# Altium PCB Top_old.PcbDoc (part 1 of 3)
Units mm, origin at the board's own origin, x right, y up, seen from the top; angles counter-clockwise.
Board outline 65.25 x 71.45 mm, 4 copper layers (Top Layer, GND, PWR_3V3, Bottom Layer), stack 0.603 mm thick; 141 components, 87 nets, 448 pads, 153 vias.
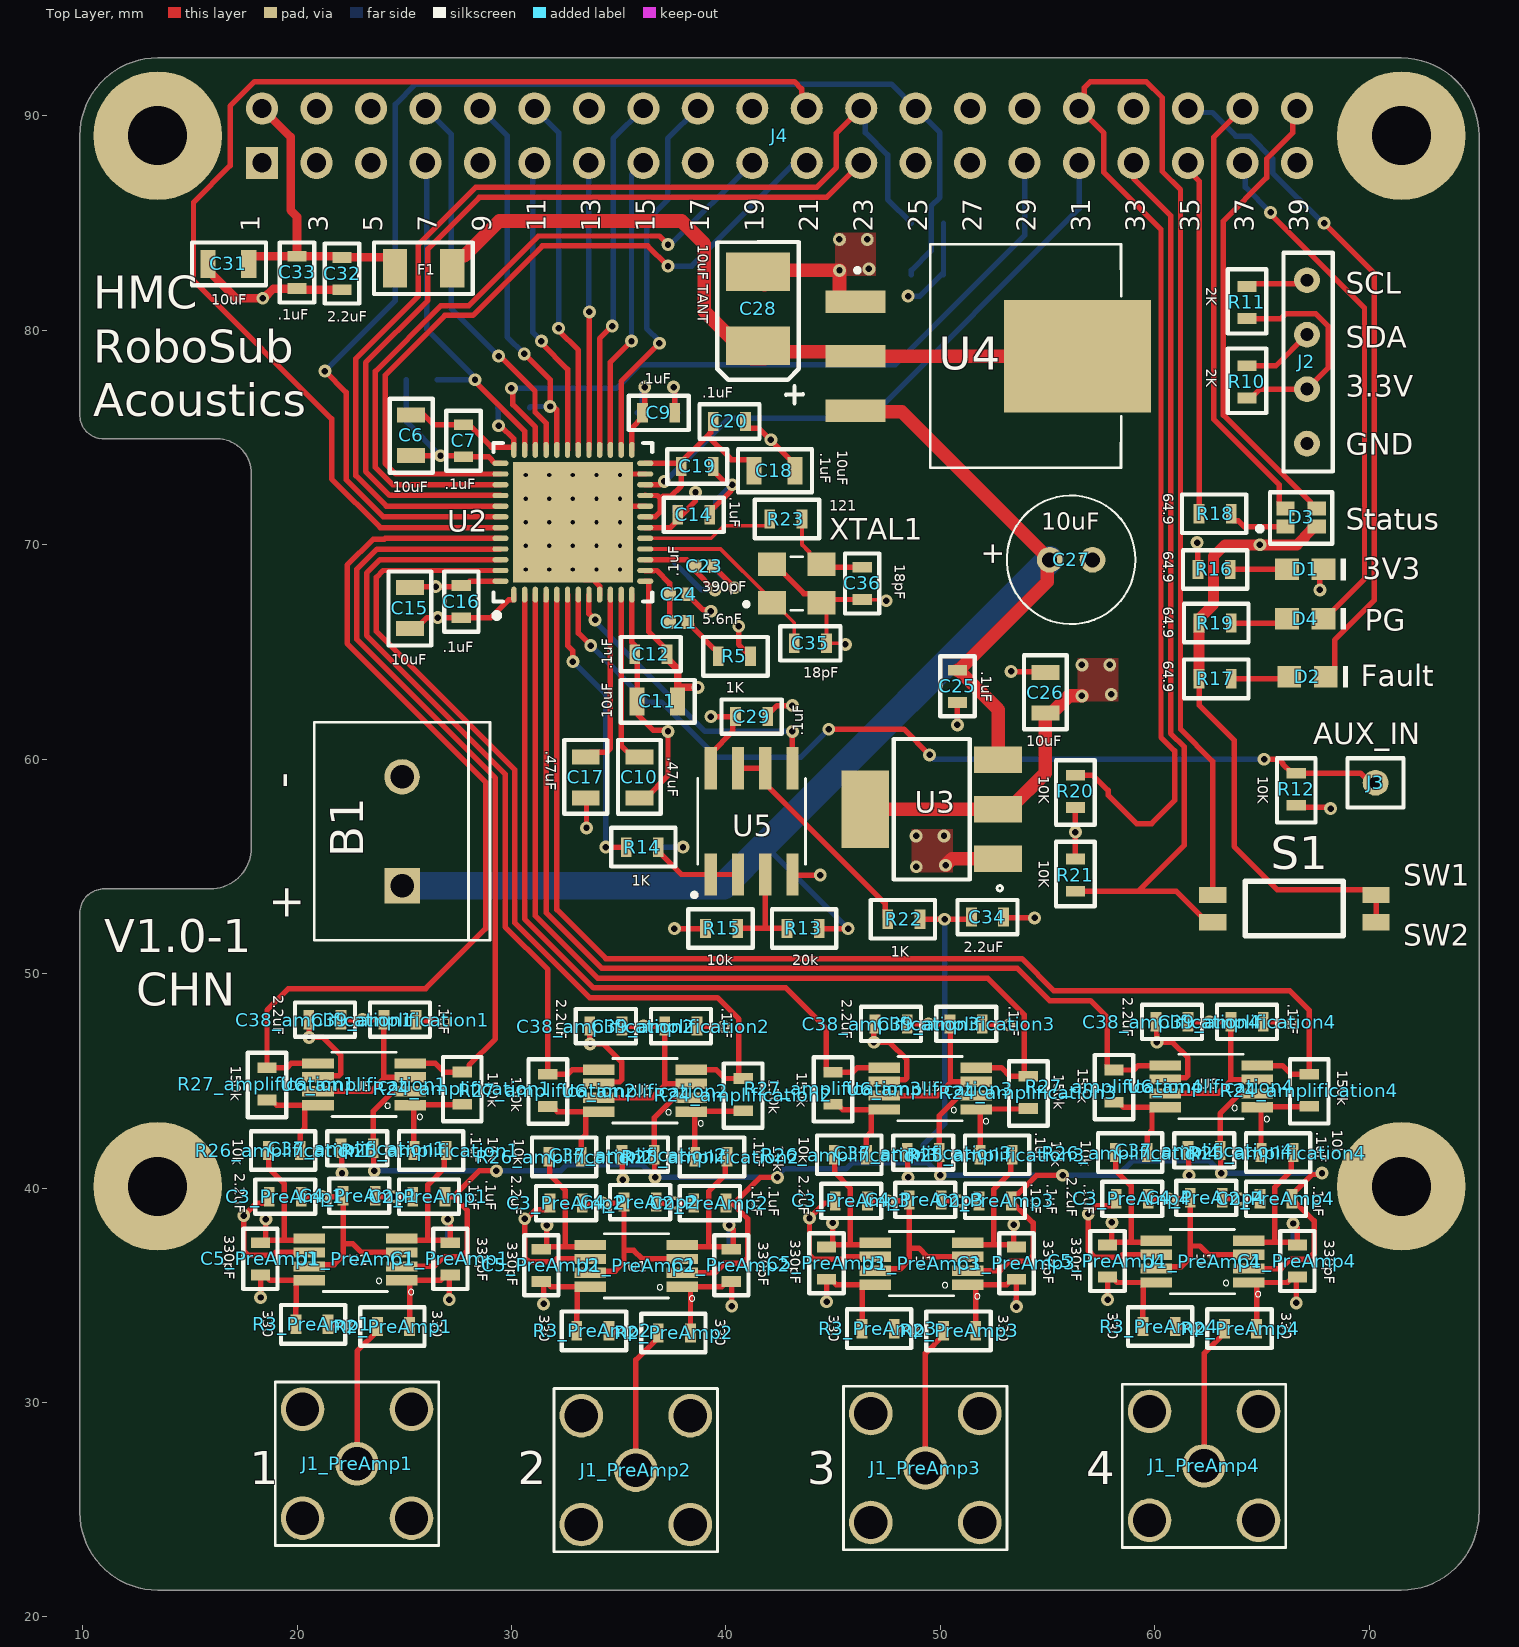
[diagram p0: Top Layer view]
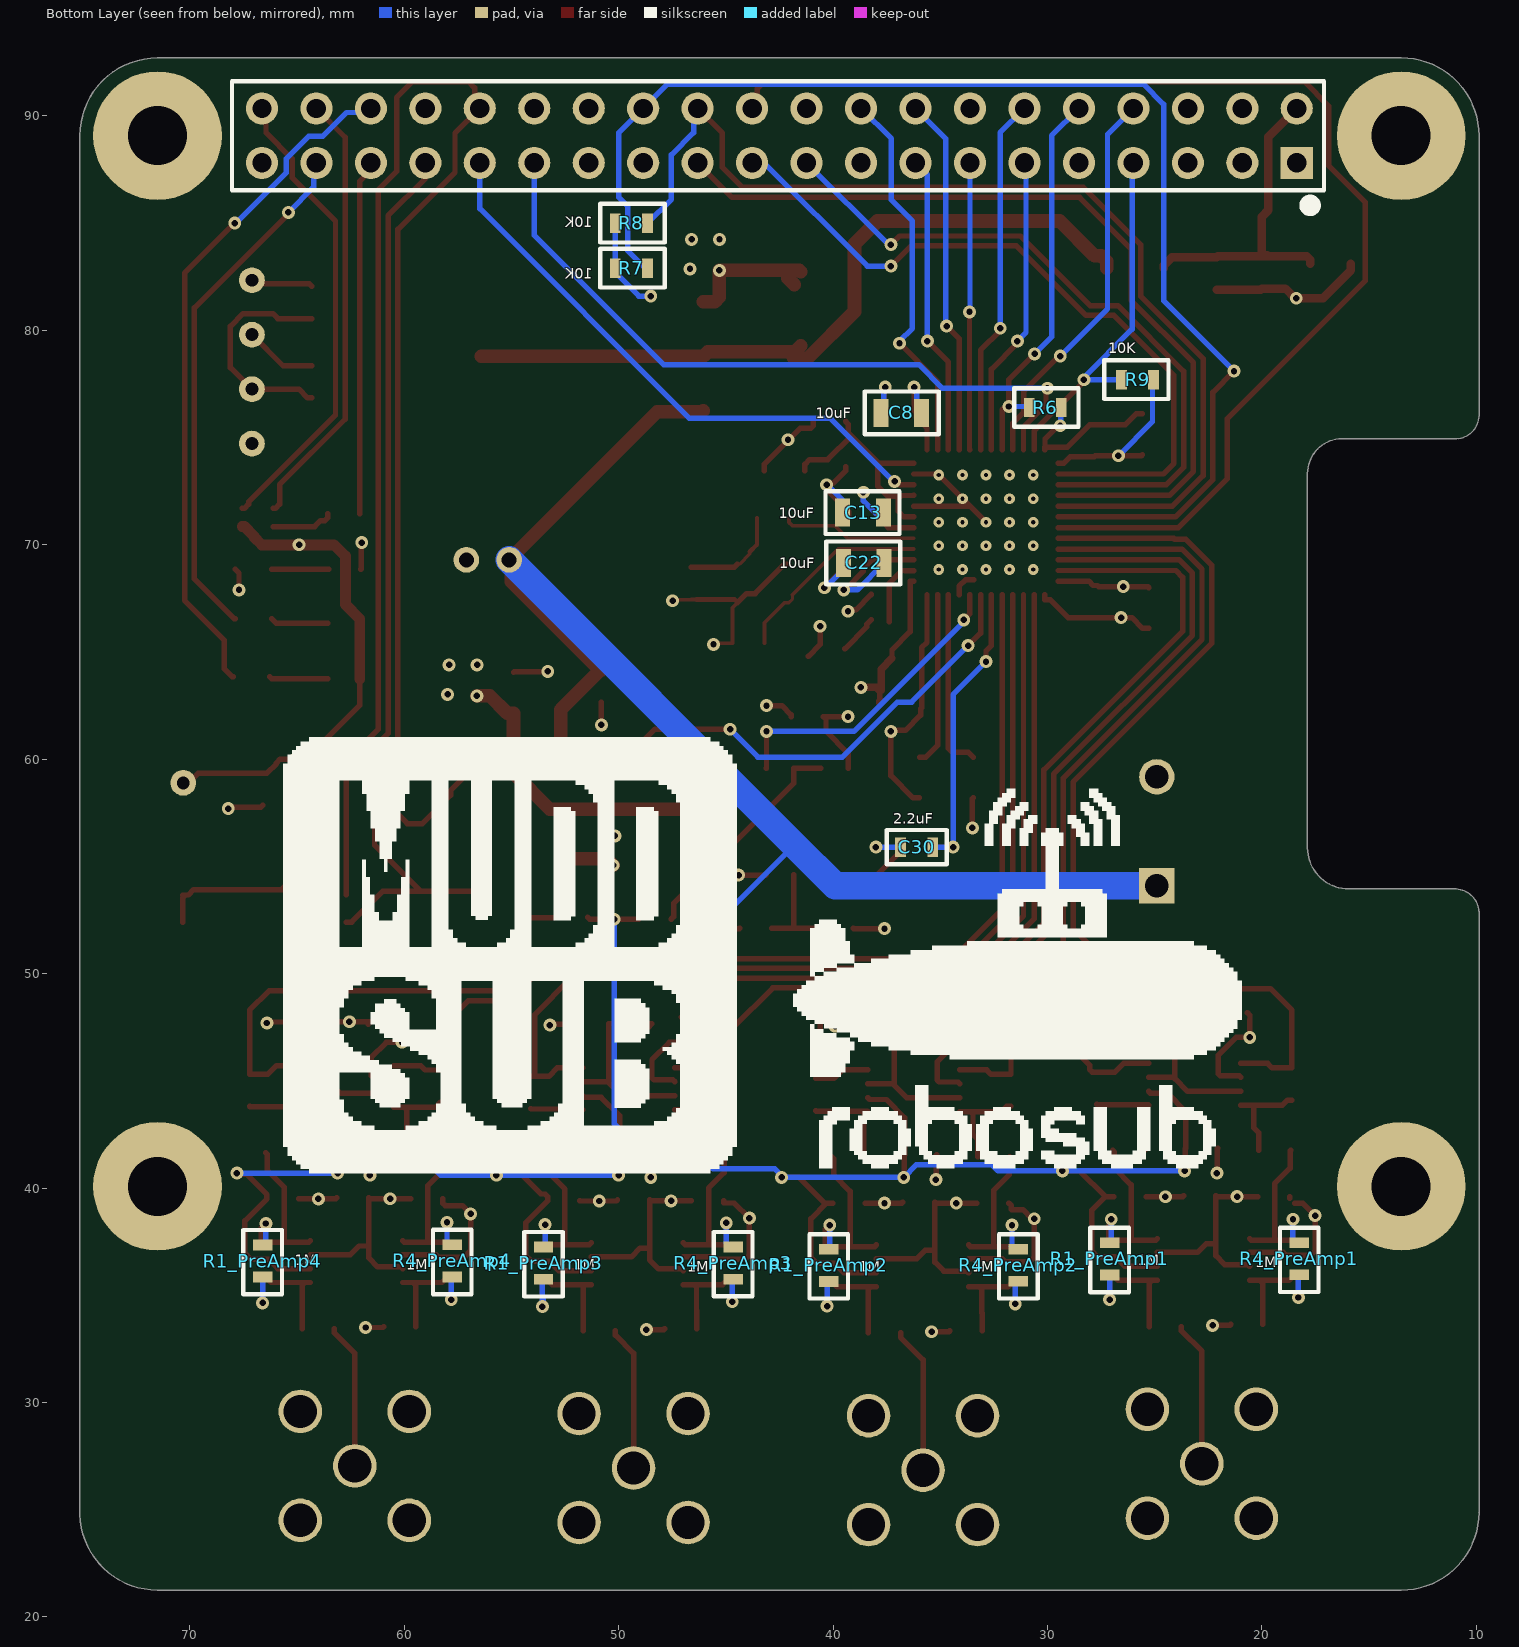
[diagram p1: Bottom Layer view, seen from below]
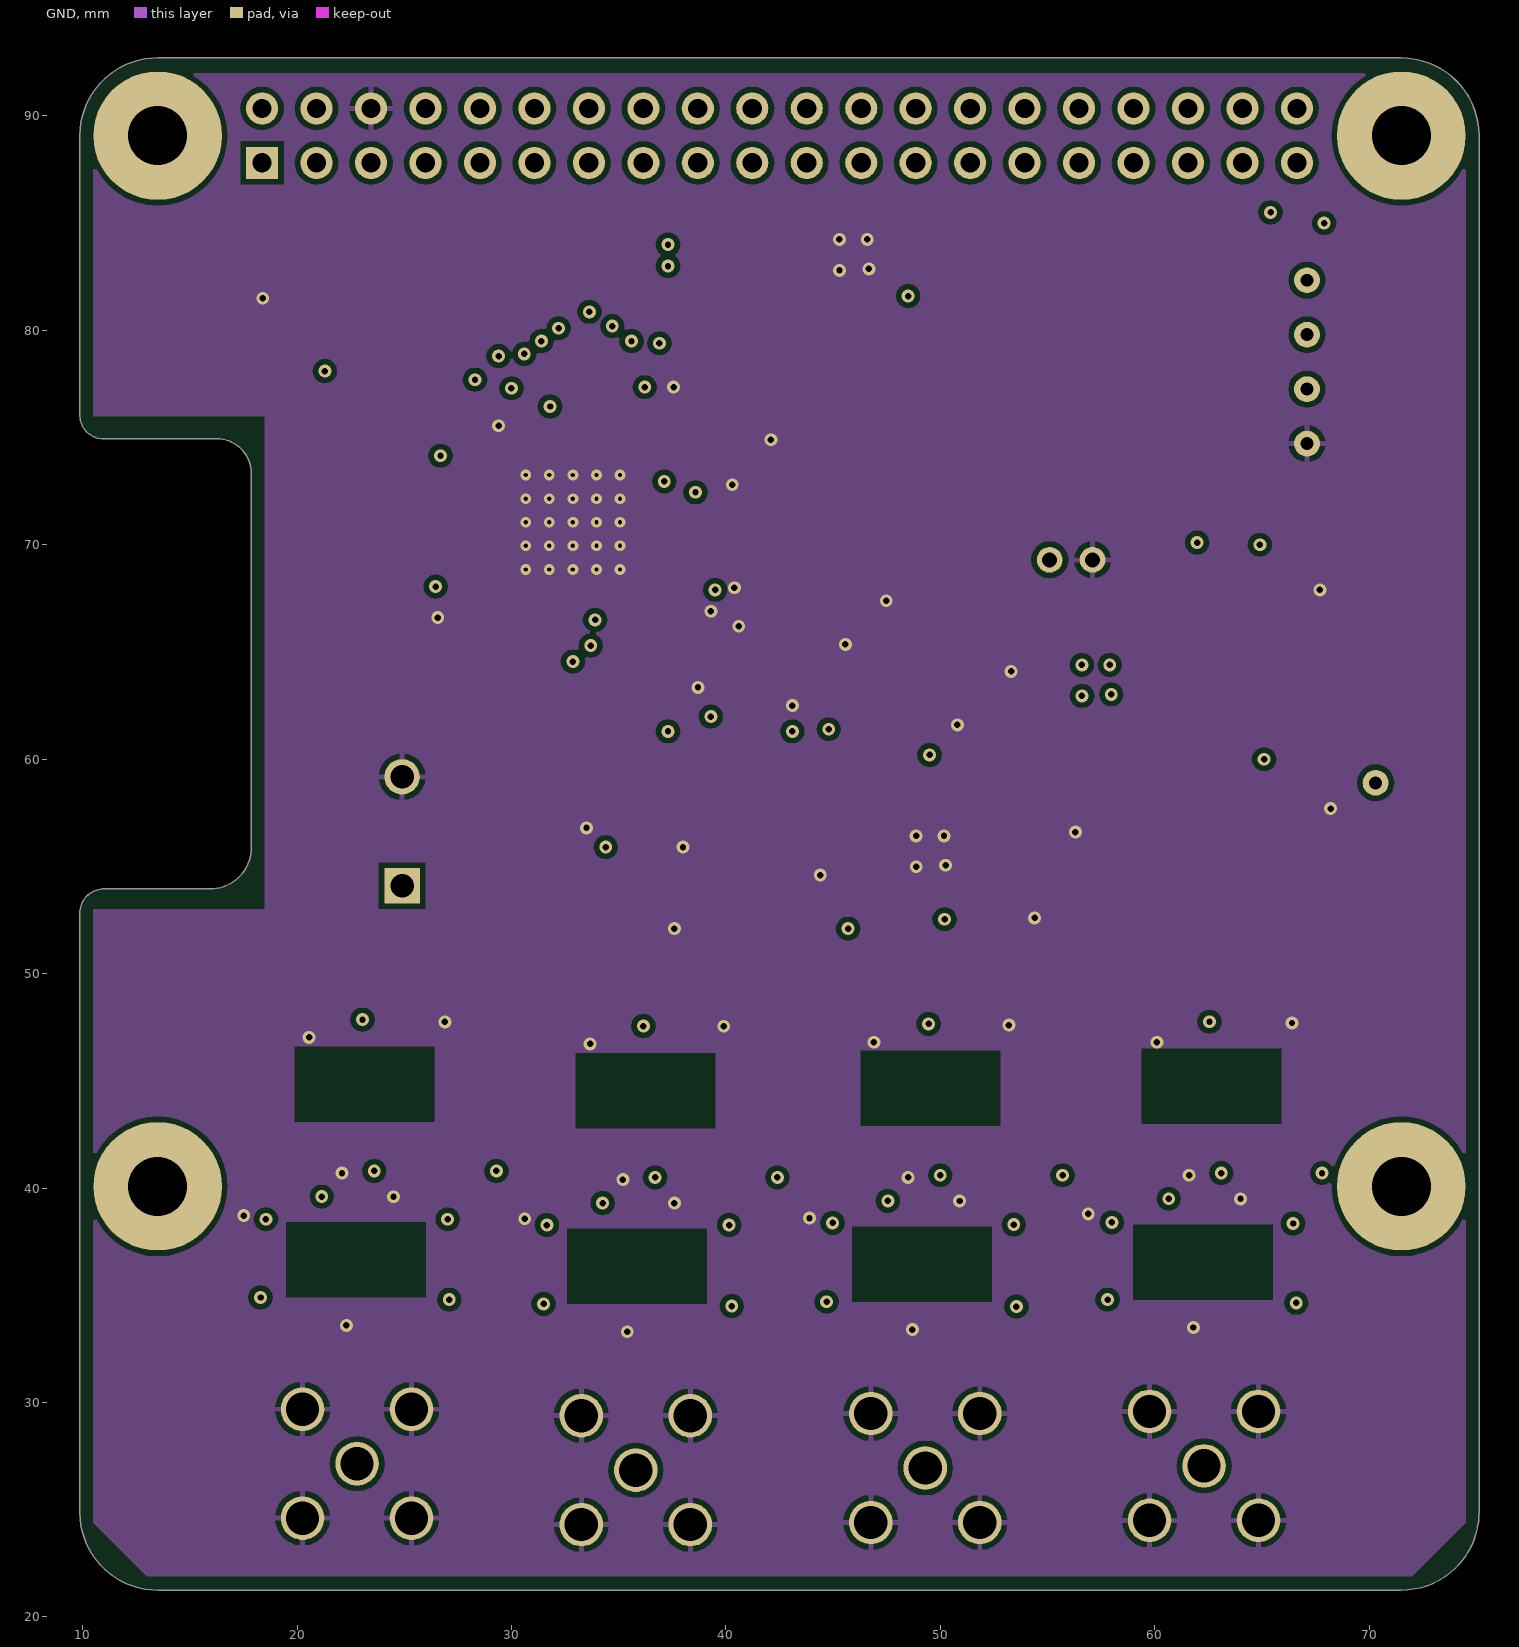
[diagram p2: GND]
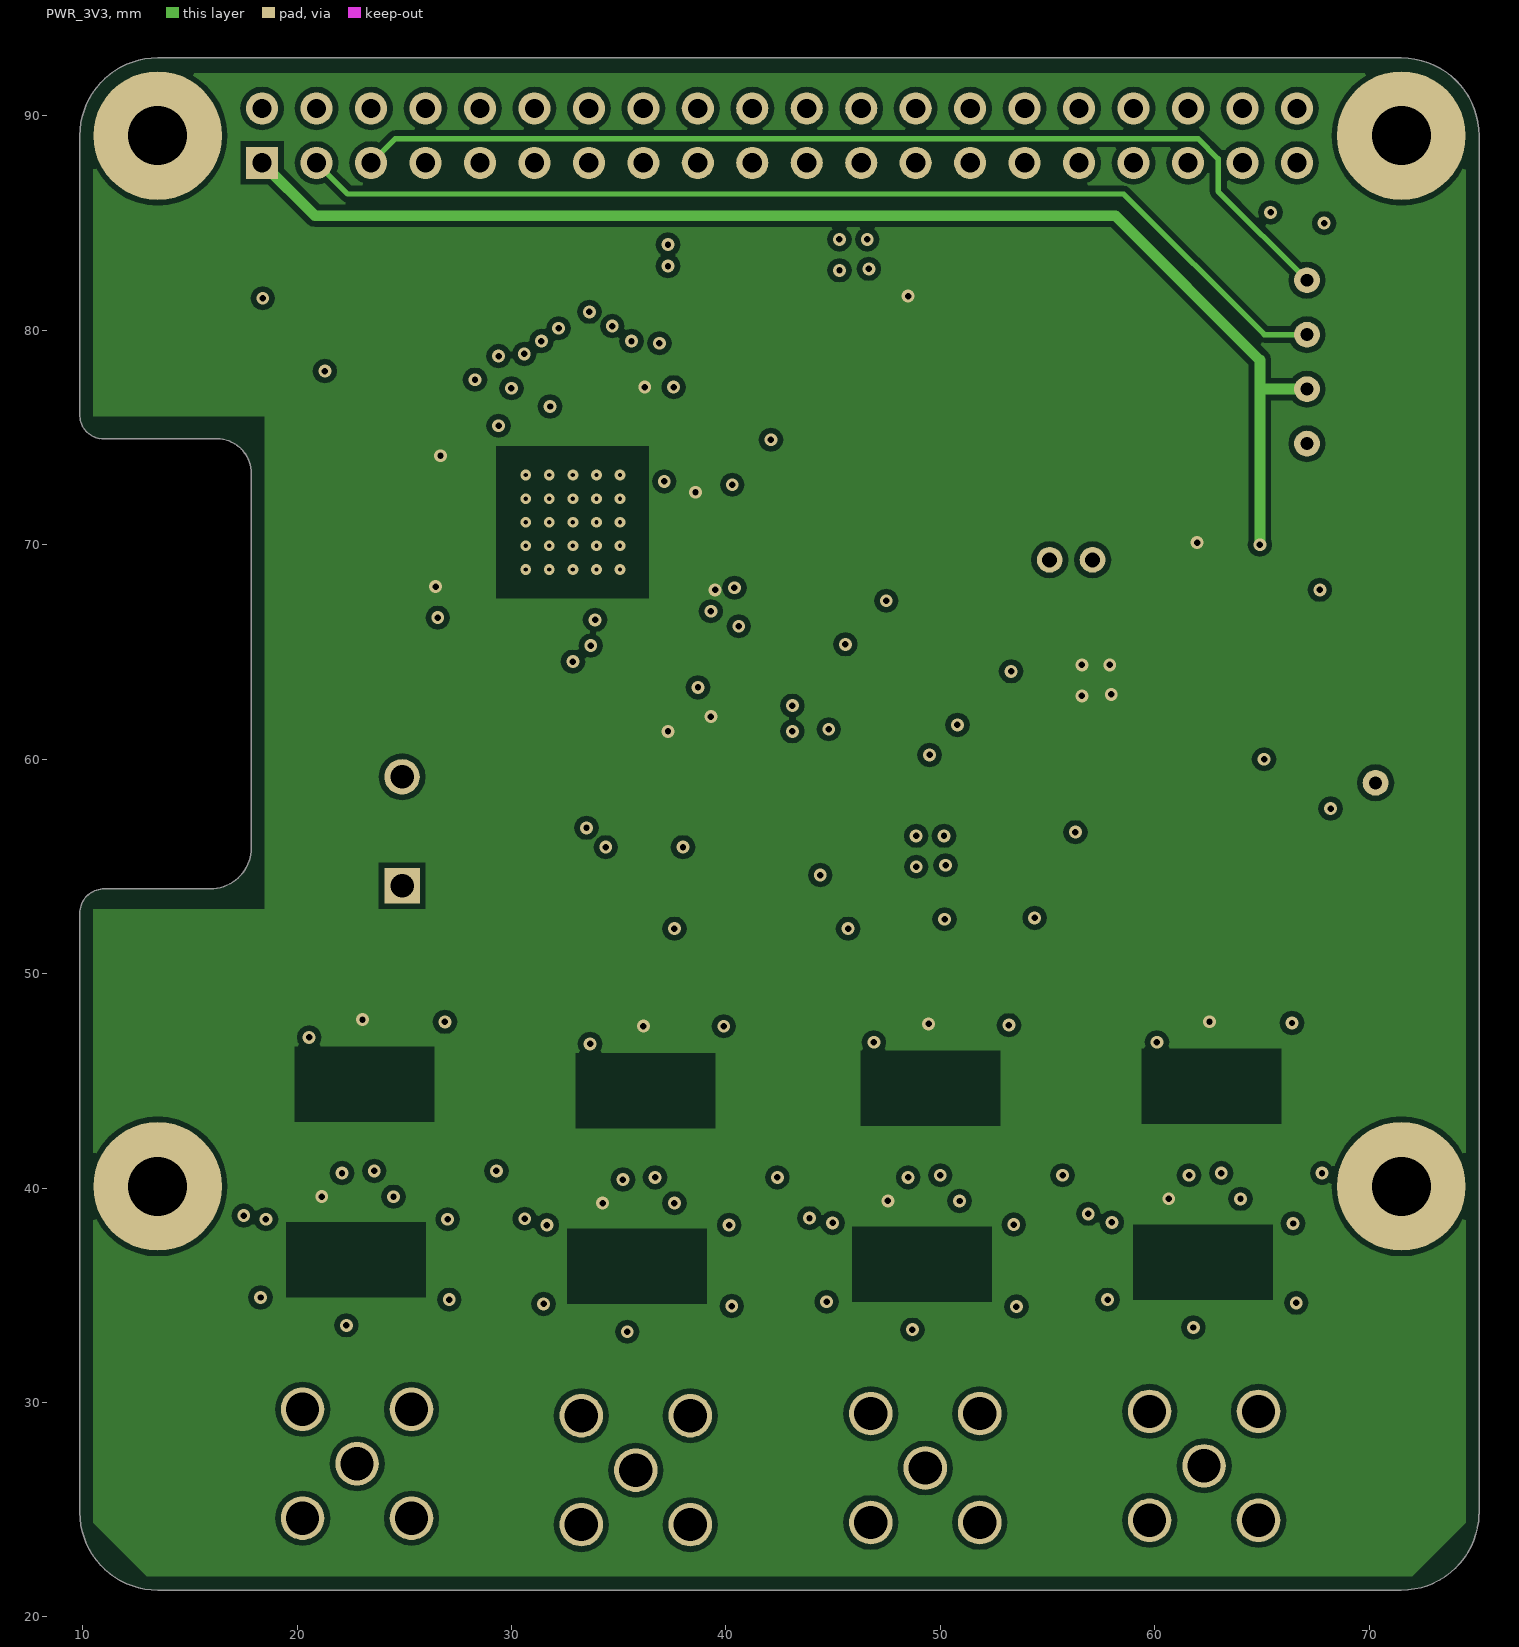
[diagram p3: PWR_3V3]
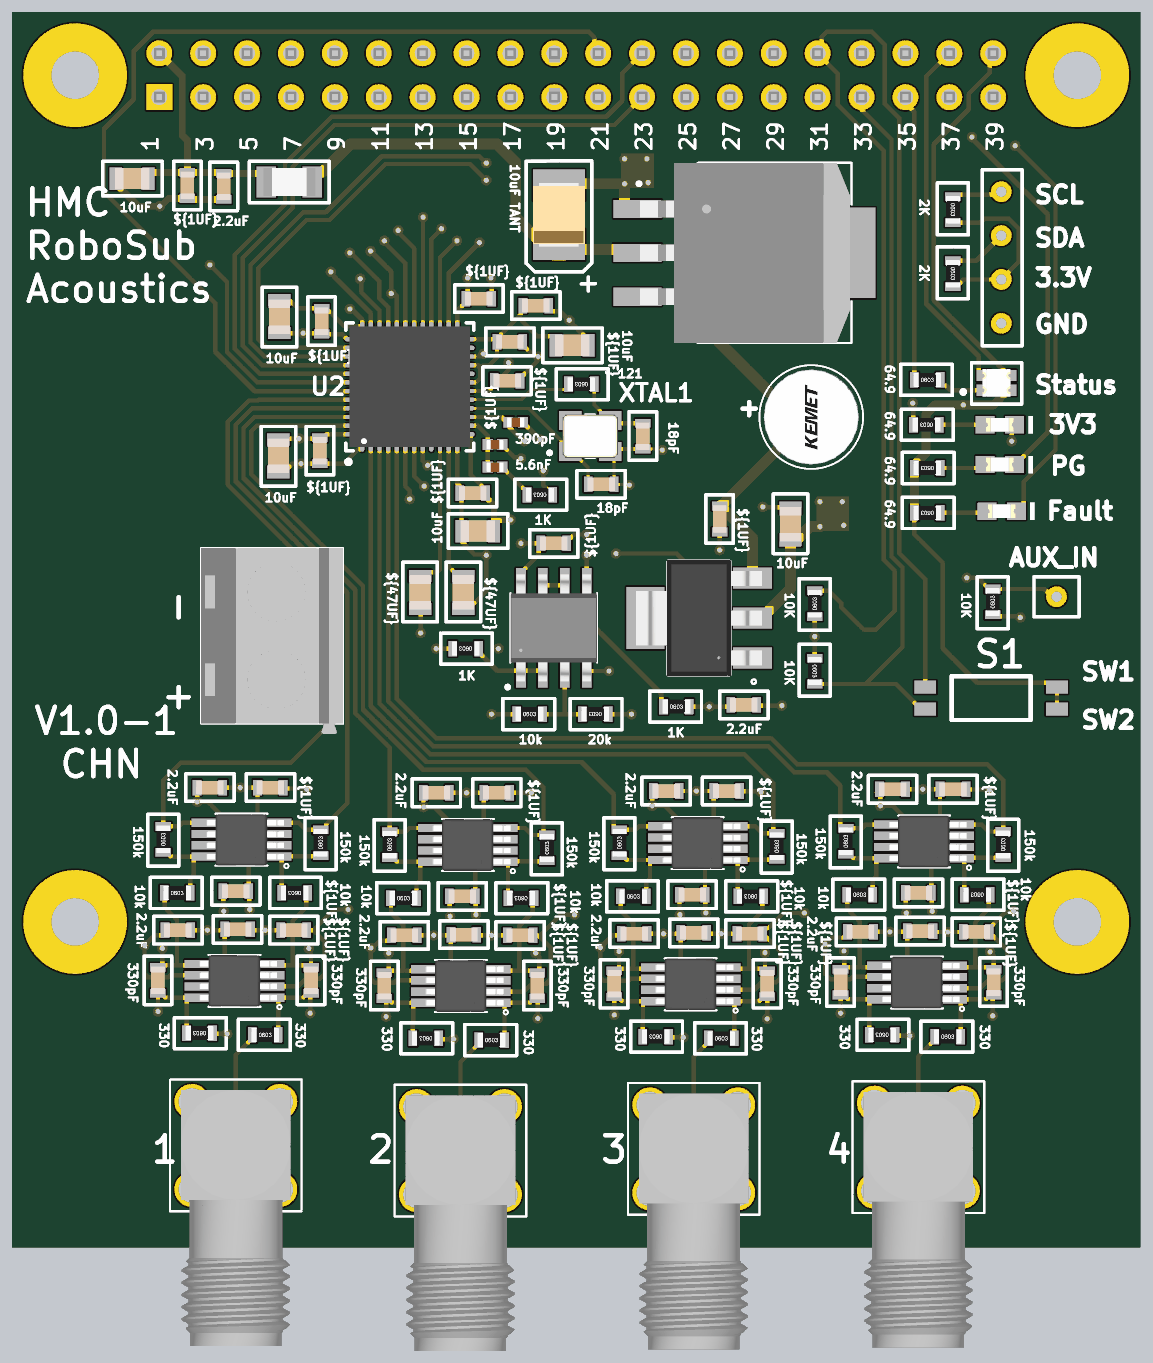
[diagram p5: 3D render of the assembled board from above, using the file's embedded part models]
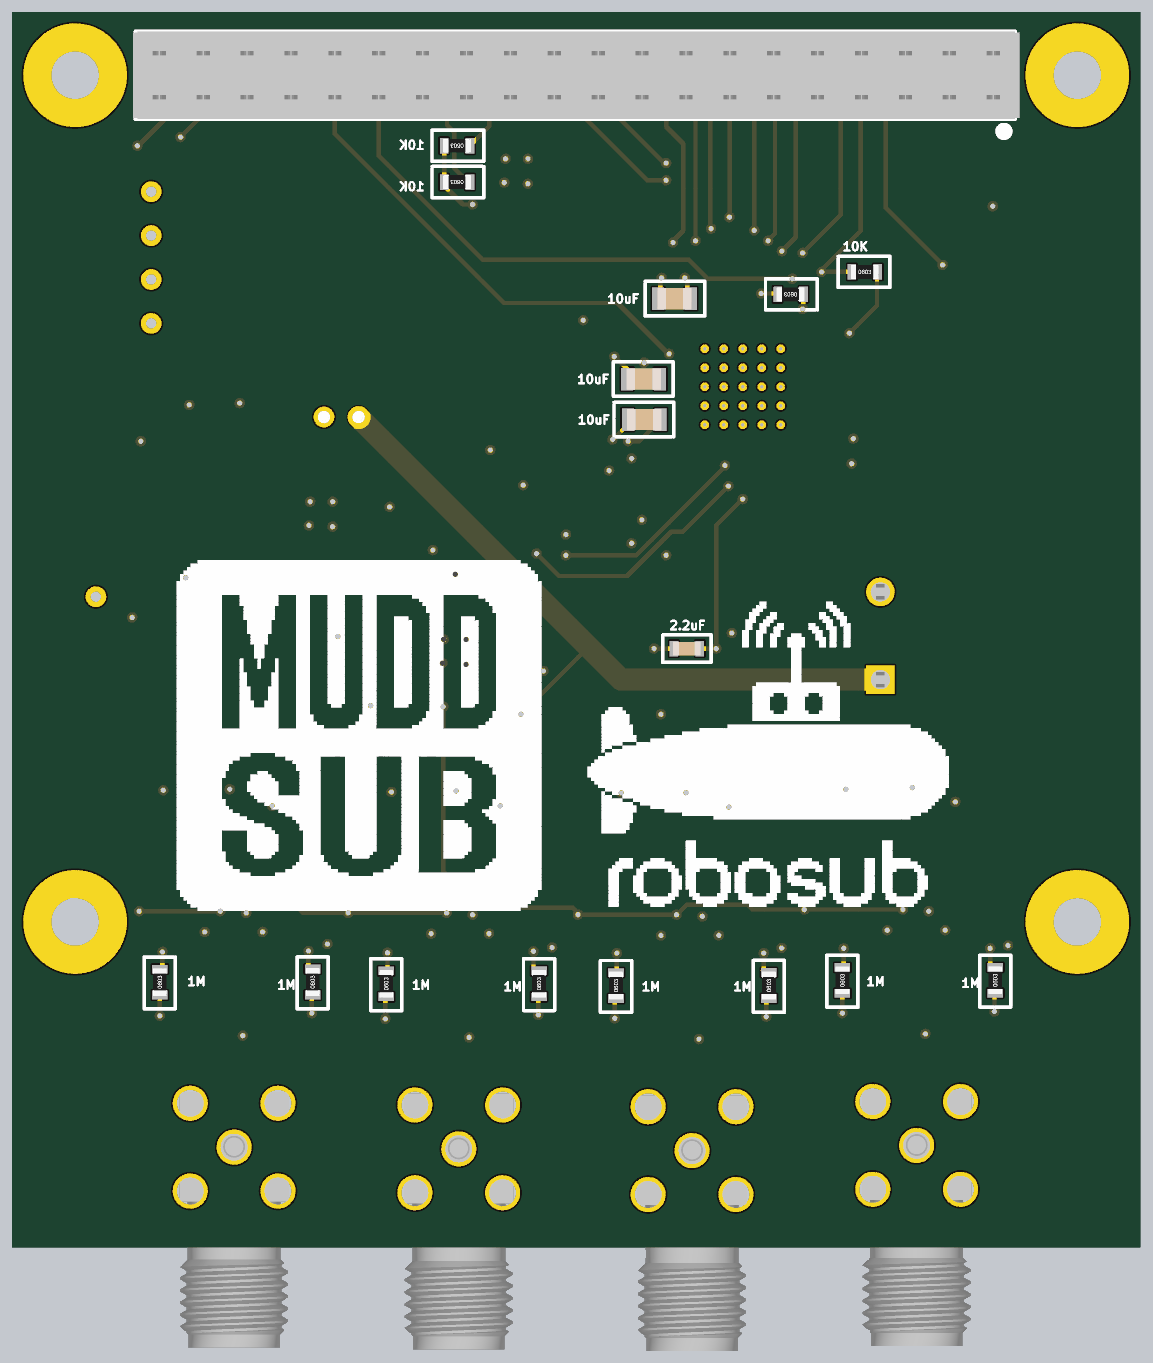
[diagram p6: 3D render of the assembled board from below, using the file's embedded part models]

## Layer stack, top to bottom
Top Solder: solder mask 0.0102, Solder Resist, Dk 3.5
Top Layer: signal copper 0.0356
Dielectric 2: prepreg 0.0711, PP-006, Dk 4.1
GND: signal copper 0.035
Dielectric 1: dielectric 0.32, FR-4, Dk 4.8
PWR_3V3: signal copper 0.035
Dielectric 3: prepreg 0.0711, PP-006, Dk 4.1
Bottom Layer: signal copper 0.0356
Bottom Solder: solder mask 0.0102, Solder Resist, Dk 3.5

## Board outline
9.875,24.89 cw(c10.002,24.9) 9.875,24.9 9.875,52.9 cw(c10.002,52.9) 9.875,52.91 cw(c11.001,52.823) 11.027,53.952 cw(c11.001,52.823) 11.028,53.952 11.025,53.952 15.95,53.952 ccw(c15.95,55.875) 17.873,55.875 17.873,73.3 cw(c18,73.3) 17.873,73.302 ccw(c16.25,73.325) 17.873,73.325 ccw(c16.25,73.325) 16.274,74.948 ccw(c16.25,73.325) 16.273,74.948 16.275,74.948 11.002,74.948 cw(c10.963,76.037) 9.875,75.995 cw(c10.002,76) 9.875,76 9.875,89.079 9.875,89.08 cw(c13.502,89.08) 13.502,92.707 71.502,92.707 cw(c71.502,92.58) 71.502,92.707 cw(c71.498,89.084) 75.121,89.084 cw(c71.498,89.084) 75.121,89.08 75.121,24.882 cw(c74.994,24.88) 75.121,24.88 cw(c71.498,24.876) 75.121,24.876 cw(c71.498,24.876) 75.121,24.864 75.121,24.8 cw(c74.994,24.8) 75.12,24.783 cw(c71.498,24.876) 71.502,21.253 cw(c71.502,21.38) 71.502,21.253 13.502,21.253 cw(c13.502,24.88) 9.875,24.88 cw(c10.002,24.88)

## Design rules (kind name [scope] priority, off if disabled: settings)
Clearance [All] p1: gap=0.254 ignorepadtopadclearanceinfootprint=FALSE except(0: Arc-Hole Track-Hole SMDPad-Hole THPad-Hole Via-Hole Fill-Hole Poly-Hole Region-Hole Text-Hole; 0.15: SMDPad-SMDPad; 0.2: Arc-Arc Arc-Track Arc-SMDPad Track-Track Track-SMDPad)
HoleSize [All] p1: absolutevalues=TRUE maxlimit=3 minlimit=0.26 maxpercent=80.000 minpercent=20.000
MinimumSolderMaskSliver [All] p1: minsoldermaskwidth=0.04
PlaneConnect [All] p1: pad.planeconnectstyle=Relief pad.reliefexpansion=0.508 pad.reliefentries=4 pad.reliefconductorwidth=0.254 pad.reliefairgap=0.254 via.planeconnectstyle=Direct via.reliefexpansion=0.508 via.reliefentries=4 via.reliefconductorwidth=0.254 via.reliefairgap=0.254
PolygonConnect [All] p1: thpad.connectstyle=Relief thpad.reliefconductorwidth=0.254 thpad.reliefentries=4 thpad.polygonreliefangle="90 Angle" thpad.airgapwidth=0.254 smdpad.connectstyle=Relief smdpad.reliefconductorwidth=0.254 smdpad.reliefentries=4 smdpad.polygonreliefangle="90 Angle" smdpad.airgapwidth=0.254 via.connectstyle=Direct via.reliefconductorwidth=0.254 via.reliefentries=4 via.polygonreliefangle="90 Angle" via.airgapwidth=0.254
RoutingVias [All] p1: holewidth=0.3 width=0.6 viastyle="Through Hole" minholewidth=0.3 minwidth=0.6 maxholewidth=0.711 maxwidth=1.27
SilkToSilkClearance [All] p1: silktosilkclearance=0.1
SilkToSolderMaskClearance [IsPad] p1: minsilkscreentomaskgap=0.1 clearancetoexposedcopper=TRUE
SolderMaskExpansion [All] p1: expansion=0.102
Width [All] p1: maxlimit=2.54 minlimit=0.15 preferedwidth=0.254 minimp=50.000000 maximp=50.000000 favimp=50.000000
25 further rules are at their usual default settings.

## Classes and differential pairs
channel class Preamp: PreAmp1 PreAmp2 PreAmp3 PreAmp4
channel class "Analog Channel": ANALOG1 ANALOG2 ANALOG3 ANALOG4
channel class amplification: amplification1 amplification2 amplification3 amplification4
net class GPIO[2..6]: GPIO2 GPIO3 GPIO4 GPIO5 GPIO6
net class AINP[1..4]: AINP1 AINP2 AINP3 AINP4
net class AINN[1..4]: AINN1 AINN2 AINN3 AINN4
net class ADC_DATA[0..7]: ADC_DATA0 ADC_DATA1 ADC_DATA2 ADC_DATA3 ADC_DATA4 ADC_DATA5 ADC_DATA6 ADC_DATA7

## Components (designator, comment, footprint, x,y, rotation, side; value= is the part's Value field where it differs from the comment)
B1 "9V" *TE_282837-2 24.9,56.64 r90 top
C1_PreAmp1 "330pF" C0603 27.153,36.7 r90 top (schematic designator C1)
C1_PreAmp2 "330pF" C0603 40.253,36.4 r90 top (schematic designator C1)
C1_PreAmp3 "330pF" C0603 53.553,36.5 r90 top (schematic designator C1)
C1_PreAmp4 "330pF" C0603 66.653,36.6 r90 top (schematic designator C1)
C2_PreAmp1 ".1uF" C0603 26.154,39.603 r0 top (schematic designator C2)
C2_PreAmp2 ".1uF" C0603 39.254,39.303 r0 top (schematic designator C2)
C2_PreAmp3 ".1uF" C0603 52.554,39.403 r0 top (schematic designator C2)
C2_PreAmp4 ".1uF" C0603 65.654,39.503 r0 top (schematic designator C2)
C3_PreAmp1 "2.2uF" C0603 19.45,39.603 r180 top (schematic designator C3)
C3_PreAmp2 "2.2uF" C0603 32.55,39.303 r180 top (schematic designator C3)
C3_PreAmp3 "2.2uF" C0603 45.85,39.403 r180 top (schematic designator C3)
C3_PreAmp4 "2.2uF" C0603 58.95,39.503 r180 top (schematic designator C3)
C4_PreAmp1 ".1uF" C0603 22.9,39.648 r0 top (schematic designator C4)
C4_PreAmp2 ".1uF" C0603 36,39.348 r0 top (schematic designator C4)
C4_PreAmp3 ".1uF" C0603 49.3,39.448 r0 top (schematic designator C4)
C4_PreAmp4 ".1uF" C0603 62.4,39.548 r0 top (schematic designator C4)
C5_PreAmp1 "330pF" C0603 18.295,36.7 r90 top (schematic designator C5)
C5_PreAmp2 "330pF" C0603 31.395,36.4 r90 top (schematic designator C5)
C5_PreAmp3 "330pF" C0603 44.695,36.5 r90 top (schematic designator C5)
C5_PreAmp4 "330pF" C0603 57.795,36.6 r90 top (schematic designator C5)
C6 "10uF" C0805 25.324,75.108 r90 top
C7 ".1uF" C0603 27.766,74.852 r270 top
C8 "10uF" C0805 36.816,76.152 r0 bottom
C9 ".1uF" C0603 36.866,76.152 r180 top
C10 ".47uF" C0805 35.966,59.152 r270 top
C11 "10uF" C0805 36.8,62.7 r180 top
C12 ".1uF" C0603 36.5,64.9 r0 top
C13 "10uF" C0805 38.6,71.5 r180 bottom
C14 ".1uF" C0603 38.5,71.4 r0 top
C15 "10uF" C0805 25.266,67.052 r90 top
C16 ".1uF" C0603 27.666,67.352 r270 top
C17 ".47uF" C0805 33.466,59.152 r270 top
C18 "10uF" C0805 42.266,73.452 r180 top
C19 ".1uF" C0603 38.666,73.652 r180 top
C20 ".1uF" C0603 40.166,75.752 r180 top
C21 "5.6nF" C0402 37.8,66.4 r180 top
C22 "10uF" C0805 38.566,69.152 r180 bottom
C23 ".1uF" C0402 39,69 r180 top
C24 "390pF" c0402 37.8,67.7 r180 top
C25 ".1uF" C0603 50.8,63.4 r90 top
C26 "10uF" C0805 54.9,63.1 r270 top
C27 "10uF" ESK106M035AC3AA 57.1,69.3 r180 top
C28 "10uF TANT" 293D106X9016B2TE3 41.5,81 r270 top
C29 ".1uF" C0603 41.2,61.989 r0 top
C30 "2.2uF" C0603 36.1,55.9 r180 bottom
C31 "10uF" C0805 16.8,83.1 r180 top
C32 "2.2uF" C0603 22.1,82.65 r270 top
C33 ".1uF" C0603 20,82.7 r270 top
C34 "2.2uF" C0603 52.2,52.64 r180 top
C35 "18pF" C0603 43.942,65.405 r180 top
C36 "18pF" C0603 46.355,68.199 r90 top
C37_amplification1 ".1uF" C0603 22.804,41.858 r0 top (schematic designator C37)
C37_amplification2 ".1uF" C0603 35.904,41.558 r0 top (schematic designator C37)
C37_amplification3 ".1uF" C0603 49.204,41.658 r0 top (schematic designator C37)
C37_amplification4 ".1uF" C0603 62.304,41.758 r0 top (schematic designator C37)
C38_amplification1 "2.2uF" C0603 21.304,47.858 r180 top (schematic designator C38)
C38_amplification2 "2.2uF" C0603 34.404,47.558 r180 top (schematic designator C38)
C38_amplification3 "2.2uF" C0603 47.704,47.658 r180 top (schematic designator C38)
C38_amplification4 "2.2uF" C0603 60.804,47.758 r180 top (schematic designator C38)
C39_amplification1 ".1uF" C0603 24.804,47.858 r0 top (schematic designator C39)
C39_amplification2 ".1uF" C0603 37.904,47.558 r0 top (schematic designator C39)
C39_amplification3 ".1uF" C0603 51.204,47.658 r0 top (schematic designator C39)
C39_amplification4 ".1uF" C0603 64.304,47.758 r0 top (schematic designator C39)
D1 "GREEN LED" *0603 67.019,68.85 r0 top
D2 "RED LED" *0603 67.119,63.85 r0 top
D3 "RGB LED" RGB_LED_LTST-C19HE1WT 66.1,70.85 r90 top
D4 "GREEN LED" *0603 67.019,66.55 r0 top
F1 "750mA Fuse" FUSE_C1T_1206 25.9,82.9 r0 top
J1_PreAmp1 "J" hydrophones_sma_conn 22.8,27.148 r0 top (schematic designator J1)
J1_PreAmp2 "J" hydrophones_sma_conn 35.8,26.847 r0 top (schematic designator J1)
J1_PreAmp3 "J" hydrophones_sma_conn 49.3,26.947 r0 top (schematic designator J1)
J1_PreAmp4 "J" hydrophones_sma_conn 62.3,27.047 r0 top (schematic designator J1)
J2 "AUX_JUMPER" HEADERPINS_4X1 67.1,74.72 r90 top
J3 "Single Output Conn" HEADERPINS_1x1 70.3,58.9 r0 top
J4 "RasPi" RPI 42.502,89.08 r180 top
R1_PreAmp1 "1M" R0603 27.1,36.7 r90 bottom (schematic designator R1)
R1_PreAmp2 "1M" R0603 40.2,36.4 r90 bottom (schematic designator R1)
R1_PreAmp3 "1M" R0603 53.5,36.5 r90 bottom (schematic designator R1)
R1_PreAmp4 "1M" R0603 66.6,36.6 r90 bottom (schematic designator R1)
R2_PreAmp1 "330" R0603 24.5,33.545 r0 top (schematic designator R2)
R2_PreAmp2 "330" R0603 37.6,33.245 r0 top (schematic designator R2)
R2_PreAmp3 "330" R0603 50.9,33.345 r0 top (schematic designator R2)
R2_PreAmp4 "330" R0603 64,33.445 r0 top (schematic designator R2)
R3_PreAmp1 "330" R0603 20.7,33.645 r180 top (schematic designator R3)
R3_PreAmp2 "330" R0603 33.8,33.345 r180 top (schematic designator R3)
R3_PreAmp3 "330" R0603 47.1,33.445 r180 top (schematic designator R3)
R3_PreAmp4 "330" R0603 60.2,33.545 r180 top (schematic designator R3)
R4_PreAmp1 "1M" R0603 18.255,36.704 r90 bottom (schematic designator R4)
R4_PreAmp2 "1M" R0603 31.355,36.404 r90 bottom (schematic designator R4)
R4_PreAmp3 "1M" R0603 44.655,36.504 r90 bottom (schematic designator R4)
R4_PreAmp4 "1M" R0603 57.755,36.604 r90 bottom (schematic designator R4)
R5 "1K" R0603 40.4,64.8 r180 top
R6 "10K" R0603 30.1,76.4 r0 bottom
R7 "10K" R0603 49.4,82.9 r0 bottom
R8 "10K" R0603 49.4,85 r0 bottom
R9 "10K" R0603 25.8,77.7 r180 bottom
R10 "2K" R0603 64.3,77.6 r270 top
R11 "2K" R0603 64.3,81.3 r270 top
R12 "10K" R0603 66.6,58.6 r90 top
R13 "20k" R0603 43.6,52.111 r180 top
R14 "1K" R0603 36.1,55.9 r180 top
R15 "10k" R0603 39.8,52.111 r0 top
R16 "64.9" R0603 62.769,68.85 r180 top
R17 "64.9" R0603 62.819,63.75 r180 top
R18 "64.9" R0603 62.819,71.45 r0 top
R19 "64.9" R0603 62.819,66.35 r180 top
R20 "10K" R0603 56.3,58.5 r90 top
R21 "10K" R0603 56.3,54.6 r270 top
R22 "1K" R0603 48.3,52.54 r0 top
R23 "121" R0603 42.8,71.2 r180 top
R24_amplification1 "150k" R0603 27.704,44.662 r90 top (schematic designator R24)
R24_amplification2 "150k" R0603 40.804,44.362 r90 top (schematic designator R24)
R24_amplification3 "150k" R0603 54.104,44.462 r90 top (schematic designator R24)
R24_amplification4 "150k" R0603 67.204,44.562 r90 top (schematic designator R24)
R25_amplification1 "10k" R0603 26.204,41.758 r180 top (schematic designator R25)
R25_amplification2 "10k" R0603 39.304,41.458 r180 top (schematic designator R25)
R25_amplification3 "10k" R0603 52.604,41.558 r180 top (schematic designator R25)
R25_amplification4 "10k" R0603 65.704,41.658 r180 top (schematic designator R25)
R26_amplification1 "10k" R0603 19.404,41.758 r0 top (schematic designator R26)
R26_amplification2 "10k" R0603 32.504,41.458 r0 top (schematic designator R26)
R26_amplification3 "10k" R0603 45.804,41.558 r0 top (schematic designator R26)
R26_amplification4 "10k" R0603 58.904,41.658 r0 top (schematic designator R26)
R27_amplification1 "150k" R0603 18.6,44.858 r90 top (schematic designator R27)
R27_amplification2 "150k" R0603 31.7,44.558 r90 top (schematic designator R27)
R27_amplification3 "150k" R0603 45,44.658 r90 top (schematic designator R27)
R27_amplification4 "150k" R0603 58.1,44.758 r90 top (schematic designator R27)
S1 "DIP2" CHS-02TB 70.32,52.4 r180 top
U1_PreAmp1 "THS4551IDGKT" *SOP65P490X110-8N 22.724,36.674 r180 top (schematic designator U1)
U1_PreAmp2 "THS4551IDGKT" *SOP65P490X110-8N 35.824,36.374 r180 top (schematic designator U1)
U1_PreAmp3 "THS4551IDGKT" *SOP65P490X110-8N 49.124,36.474 r180 top (schematic designator U1)
U1_PreAmp4 "THS4551IDGKT" *SOP65P490X110-8N 62.224,36.574 r180 top (schematic designator U1)
U2 "ADAR7251WBCSZ" ADI-CS-48-1_L 32.866,71.052 r90 top
U3 "3V3Reg" *SOT223 49.6,57.668 r180 top
U4 "5V,3A" *TO254P1435X464-4N_5V 52.235,78.8 r270 top
U5 "OPA2325" *SOIC127P600X175-8N 41.2,57.1 r90 top
U6_amplification1 "THS4551IDGKT" *SOP65P490X110-8N 23.129,44.84 r180 top (schematic designator U6)
U6_amplification2 "THS4551IDGKT" *SOP65P490X110-8N 36.229,44.54 r180 top (schematic designator U6)
U6_amplification3 "THS4551IDGKT" *SOP65P490X110-8N 49.529,44.64 r180 top (schematic designator U6)
U6_amplification4 "THS4551IDGKT" *SOP65P490X110-8N 62.629,44.74 r180 top (schematic designator U6)
XTAL1 "ECS-192-12-33-AGM-TR" XTAL_ECS-192-12-33-AGM-TR 43.307,68.199 r0 top

## Footprints (in the part's own frame and the unit in brackets; to place one, negate y for a bottom-side part, rotate by r counter-clockwise, add the part's x,y. Pads: shape width x height; smd on the part's side, far side on the other; paste and mask are expansions set on the pad)
293D106X9016B2TE3 [mm]
  rect 1.8x3 smd: 1(-1.725,0) 2(1.725,0)
  silkscreen extent -3.12,-1.9 4.4,2.1, body extent -1.84,-1.5 1.84,1.5, height 2.13
*0603 [mm]
  rect 1.1x1 smd: 1(-0.85,0) 2(0.85,0)
  silkscreen extent 1.65,-0.51 1.91,0.51, body extent -0.8,-0.4 0.8,0.4, height 0.81
*SOIC127P600X175-8N [mm]
  rect 1.97x0.57 smd: 1(-2.475,1.905) 2(-2.475,0.635) 3(-2.475,-0.635) 4(-2.475,-1.905) 5(2.475,-1.905) 6(2.475,-0.635) 7(2.475,0.635) 8(2.475,1.905)
  silkscreen extent -3.53,-2.51 2,2.77, body extent -3.1,-2.5 3.1,2.5, height 1.77
*SOP65P490X110-8N [mm]
  rect 1.47x0.48 smd: 1(-2.15,0.975) 2(-2.15,0.325) 3(-2.15,-0.325) 4(-2.15,-0.975) 5(2.15,-0.975) 6(2.15,-0.325) 7(2.15,0.325) 8(2.15,0.975)
  silkscreen extent -2.73,-1.5 1.5,1.65, body extent -2.48,-1.5 2.48,1.5, height 1.11
*SOT223 [mil]
  rect 88x48 smd: 1(-122,91) 2(-122,0) 3(-122,-91)
  rect 86.61x141.73 smd: 4(122.01,0)
  silkscreen extent -130,-129 70,150, body extent -143,-132 144,132, height 72
*TE_282837-2 [mm]
  rect 1.65x1.65 hole 1.1: 1(-2.54,0)
  round 1.65 hole 1.1: 2(2.54,0)
  silkscreen extent -5.08,-4.1 5.08,4.1, body extent -5.68,-4.1 5.08,4.1, height 10.01
*TO254P1435X464-4N_5V [mm]
  rect 1.05x2.79 smd: 1(-2.54,-6.19) 2(0,-6.19) 3(2.54,-6.19)
  rect 5.25x6.84 smd: 4(0,4.16)
  silkscreen extent -5.21,-6.2 5.21,6.2, body extent -5.21,-6.03 5.21,6.1, height 4.8
ADI-CS-48-1_L [mm] "QFN, 48-Leads, Body 7.1x7.1mm, Pitch 0.5mm, Thermal Pad 5.6x5.6mm, IPC High Density"
  oval 0.75x0.25 smd: 1(-3.375,2.75) 2(-3.375,2.25) 3(-3.375,1.75) 4(-3.375,1.25) 5(-3.375,0.75) 6(-3.375,0.25) 7(-3.375,-0.25) 8(-3.375,-0.75) 9(-3.375,-1.25) 10(-3.375,-1.75) 11(-3.375,-2.25) 12(-3.375,-2.75) 25(3.375,-2.75) 26(3.375,-2.25) 27(3.375,-1.75) 28(3.375,-1.25) 29(3.375,-0.75) 30(3.375,-0.25) 31(3.375,0.25) 32(3.375,0.75) 33(3.375,1.25) 34(3.375,1.75) 35(3.375,2.25) 36(3.375,2.75)
  oval 0.25x0.75 smd: 13(-2.75,-3.375) 14(-2.25,-3.375) 15(-1.75,-3.375) 16(-1.25,-3.375) 17(-0.75,-3.375) 18(-0.25,-3.375) 19(0.25,-3.375) 20(0.75,-3.375) 21(1.25,-3.375) 22(1.75,-3.375) 23(2.25,-3.375) 24(2.75,-3.375) 37(2.75,3.375) 38(2.25,3.375) 39(1.75,3.375) 40(1.25,3.375) 41(0.75,3.375) 42(0.25,3.375) 43(-0.25,3.375) 44(-0.75,3.375) 45(-1.25,3.375) 46(-1.75,3.375) 47(-2.25,3.375) 48(-2.75,3.375)
  rect 5.6x5.6 smd: 49(0,0)
  silkscreen extent -4.47,-3.7 3.7,3.7, body extent -3.5,-3.5 3.5,3.5, height 0.8
C0402 [mm]
  rect 0.59x0.63 smd: 1(-0.42,0) 2(0.42,0)
  body extent -0.5,-0.28 0.5,0.28, height 0.51
c0402 [mm]
  rect 0.59x0.63 smd: 1(-0.42,0) 2(0.42,0)
  body extent -0.5,-0.28 0.5,0.28, height 0.51
C0603 [mm]
  rect 0.5x0.9 smd: 1(-0.75,0) 2(0.75,0)
  silkscreen extent -1.4,-0.8 1.4,0.8, body extent -0.8,-0.4 0.8,0.4, height 0.81
C0805 [mm]
  rect 0.7x1.3 smd: 1(-0.95,0) 2(0.95,0)
  silkscreen extent -1.75,-1 1.7,1, body extent -1,-0.63 1,0.62, height 0.61
CHS-02TB [mm]
  rect 1.27x0.76 smd: 1(0,0) 2(0,-1.27) 3(7.62,-1.27) 4(7.62,0)
  silkscreen extent 1.52,-1.9 6.1,0.64
ESK106M035AC3AA [mm]
  round 1.2 hole 0.7: 1(0,0) 2(2,0)
  silkscreen extent -2,-3 4,3, body extent -1.75,-2.77 3.75,2.75, height 12.52
FUSE_C1T_1206 [mm]
  rect 1.14x1.78 smd: 1(-1.33,0) 2(1.33,0)
  silkscreen extent -2.31,-1.2 2.3,1.2, body extent -1.51,-0.8 1.51,0.8, height 1.11
HEADERPINS_1x1 [mm]
  round 1.2 hole 0.6: 1(0,0)
  silkscreen extent -1.31,-1.15 1.3,1.15
HEADERPINS_4X1 [mm]
  round 1.2 hole 0.6: 1(0,0) 2(2.54,0) 3(5.08,0) 4(7.62,0)
  silkscreen extent -1.3,-1.2 8.9,1.1
hydrophones_sma_conn [mil]
  round 80 hole 61: 1(0,0) 2(-100,-100) 2(-100,100) 2(100,-100) 2(100,100)
  silkscreen extent -150,-150 150,150, body extent -125,-457 125,126, height 377
R0603 [mm]
  rect 0.5x0.9 smd: 1(-0.75,0) 2(0.75,0)
  silkscreen extent -1.55,-0.9 1.45,0.9, body extent -0.8,-0.4 0.8,0.4, height 0.46
RGB_LED_LTST-C19HE1WT [mm]
  rect 0.65x0.85 smd: 1(0,0) 2(0.85,0) 3(0.85,-1.45) 4(0,-1.45)
  silkscreen extent -0.8,-2.17 1.6,1.3, body extent -0.38,-1.52 2.4,0.08, height 0.36
RPI [mm]
  rect 1.5x1.5 hole 0.9: 1(24.13,1.27)
  round 1.5 hole 0.9: 2(24.13,-1.27) 3(21.59,1.27) 4(21.59,-1.27) 5(19.05,1.27) 6(19.05,-1.27) 7(16.51,1.27) 8(16.51,-1.27) 9(13.97,1.27) 10(13.97,-1.27) 11(11.43,1.27) 12(11.43,-1.27) 13(8.89,1.27) 14(8.89,-1.27) 15(6.35,1.27) 16(6.35,-1.27) 17(3.81,1.27) 18(3.81,-1.27) 19(1.27,1.27) 20(1.27,-1.27) 21(-1.27,1.27) 22(-1.27,-1.27) 23(-3.81,1.27) 24(-3.81,-1.27) 25(-6.35,1.27) 26(-6.35,-1.27) 27(-8.89,1.27) 28(-8.89,-1.27) 29(-11.43,1.27) 30(-11.43,-1.27) 31(-13.97,1.27) 32(-13.97,-1.27) 33(-16.51,1.27) 34(-16.51,-1.27) 35(-19.05,1.27) 36(-19.05,-1.27) 37(-21.59,1.27) 38(-21.59,-1.27) 39(-24.13,1.27) 40(-24.13,-1.27)
  body extent -25.65,-2.54 25.65,2.54, height 11.06
XTAL_ECS-192-12-33-AGM-TR [mm]
  rect 1.3x1.1 smd: 1(-1.15,-0.9) 2(1.15,-0.9) 3(1.15,0.9) 4(-1.15,0.9)
  silkscreen extent -2.45,-1.25 0.27,1.25, body extent -1.6,-1.26 1.6,1.24, height 0.81

## Part data
B1: library part "9V_BAT_conn_ 282837-2"
C1_PreAmp1 C1_PreAmp2 C1_PreAmp3 C1_PreAmp4 C5_PreAmp1 C5_PreAmp2 C5_PreAmp3 C5_PreAmp4: library part CC0603KRX7R9BB331, "CAP CER 330PF 50V X7R 0603", Case/Package=0603, Case Code (Metric)=1608, Dielectric=X7R, Insulation Resistance=10GR, Manufacturer 1=Yageo, Max Operating Temperature=125°C, Min Operating Temperature=-55°C, Package Quantity=1, Tolerance=10%, Voltage Rating=50V, Capacitance=330pF, Case Code (Imperial)=0603, ComponentLink1Description=https://datasheet.ciiva.com/8033/1489800-8033879.pdf?src-supplier=Element14, ComponentLink1URL=https://datasheet.ciiva.com/8033/1489800-8033879.pdf?src-supplier=Element14, ComponentLink2Description=https://datasheet.ciiva.com/17434/upy-gphc-x7r-6-3v-to-50v-8-17434663.pdf?src-supplier=Avnet+Europe, ComponentLink2URL=https://datasheet.ciiva.com/17434/upy-gphc-x7r-6-3v-to-50v-8-17434663.pdf?src-supplier=Avnet+Europe, ComponentLink3Description=https://datasheet.ciiva.com/144/mlccorderingcode-144456.pdf?src-supplier=Digi-Key, ComponentLink3URL=https://datasheet.ciiva.com/144/mlccorderingcode-144456.pdf?src-supplier=Digi-Key, ComponentLink4Description=https://datasheet.ciiva.com/144/mlccorderingcode-144454.pdf?src-supplier=Digi-Key, ComponentLink4URL=https://datasheet.ciiva.com/144/mlccorderingcode-144454.pdf?src-supplier=Digi-Key, ComponentLink5Description=https://datasheet.ciiva.com/144/mlccorderingcode-144455.pdf?src-supplier=Digi-Key, ComponentLink5URL=https://datasheet.ciiva.com/144/mlccorderingcode-144455.pdf?src-supplier=Digi-Key, ComponentLink6Description=https://datasheet.ciiva.com/11465/upy-gphc-x7r-6-3v-to-50v-8-11465240.pdf?src-supplier=Avnet, ComponentLink6URL=https://datasheet.ciiva.com/11465/upy-gphc-x7r-6-3v-to-50v-8-11465240.pdf?src-supplier=Avnet, ComponentLink7Description=https://datasheet.ciiva.com/8033/1489800-8033881.pdf?src-supplier=Element14, ComponentLink7URL=https://datasheet.ciiva.com/8033/1489800-8033881.pdf?src-supplier=Element14, ComponentLink8Description=https://datasheet.ciiva.com/7978/1489800-7978174.pdf?src-supplier=Element14, ComponentLink8URL=https://datasheet.ciiva.com/7978/1489800-7978174.pdf?src-supplier=Element14, Composition=Ceramic, Depth=0.8mm, Dissipation Factor=2.5%, Halogen Free="Halogen Free", Height=0.8mm, Lead Free="Lead Free", Length=1.6mm, Manufacturer Part Number 1=CC0603KRX7R9BB331, Mount="Surface Mount", Packaging="Tape and Reel", Pricing 1="1=0.10000, 10=0.04700, 100=0.02100, 500=0.01498, 1000=0.01177 (USD)", Radiation Hardening=No, REACH SVHC=Unknown, RoHS=Yes, Stock 1=86035, Supplier 1=Digi-Key, Termination=SMD/SMT, Thickness=0.035inch, Voltage Rating (DC)=50V, Width=0.8mm
C2_PreAmp1 C2_PreAmp2 C2_PreAmp3 C2_PreAmp4 C4_PreAmp1 C4_PreAmp2 C4_PreAmp3 C4_PreAmp4 C7 C9 C12 C14 C16 C19 C20 C25 C29 C33 C37_amplification1 C37_amplification2 C37_amplification3 C37_amplification4 C39_amplification1 C39_amplification2 C39_amplification3 C39_amplification4: library part VJ0603Y104JXJCW1BC, "0603 0.1 uF 16 V ±5 % Tolerance X7R SMT Multilayer Ceramic Chip Capacitor", Capacitance=100nF, Case/Package=0603, Case Code (Metric)=1608, Dielectric=X7R, Dielectric Material=Tantalum, Manufacturer 1="Vishay Vitramon", Max Operating Temperature=125°C, Min Operating Temperature=-55°C, Package Quantity=4000, Supplier Part Number 1=720-1685-1-ND, Tolerance=5%, Voltage Rating=16V, Case Code (Imperial)=0603, ComponentLink1Description=https://datasheet.ciiva.com/5424/vjw1bcbascomseries-223529-5424533.pdf?src-supplier=Mouser, ComponentLink1URL=https://datasheet.ciiva.com/5424/vjw1bcbascomseries-223529-5424533.pdf?src-supplier=Mouser, ComponentLink2Description=https://datasheet.ciiva.com/11491/vjw1bcbascomseries-11491768.pdf?src-supplier=Avnet, ComponentLink2URL=https://datasheet.ciiva.com/11491/vjw1bcbascomseries-11491768.pdf?src-supplier=Avnet, ComponentLink3Description=https://datasheet.ciiva.com/16215/vjw1bcbascomseries-16215161.pdf?src-supplier=Future+Electronics, ComponentLink3URL=https://datasheet.ciiva.com/16215/vjw1bcbascomseries-16215161.pdf?src-supplier=Future+Electronics, Contact Plating=Tin,Matte, Depth=0.8mm, Height=0.95mm, Lead Free="Lead Free", Length=1.6mm, Manufacturer Part Number 1=VJ0603Y104JXJCW1BC, Mount="Surface Mount", Number of Pins=2, Packaging="Tape and Reel", Pricing 1="1=0.20000, 10=0.13400, 100=0.06780, 500=0.04636, 1000=0.04101 (USD)", RoHS=Yes, Stock 1=6936, Supplier 1=Digi-Key, Termination=SMD/SMT, Voltage Rating (DC)=16V, Width=0.8mm
C3_PreAmp1 C3_PreAmp2 C3_PreAmp3 C3_PreAmp4 C30 C32 C34 C38_amplification1 C38_amplification2 C38_amplification3 C38_amplification4: library part VJ0603Y224KXJCW1BC, "Cap Ceramic 0.22uF 16V X7R 10% SMD 0603 125C Paper T/R", Capacitance=220nF, Case/Package=0603, Dielectric=X7R, Dielectric Material=Tantalum, Manufacturer 1="Vishay Vitramon", Max Operating Temperature=125°C, Min Operating Temperature=-55°C, Supplier Part Number 1=720-1853-1-ND, Tolerance=10%, Voltage Rating (DC)=16V, ComponentLink1Description=https://datasheet.ciiva.com/11490/vjw1bcbascomseries-11490982.pdf?src-supplier=Avnet, ComponentLink1URL=https://datasheet.ciiva.com/11490/vjw1bcbascomseries-11490982.pdf?src-supplier=Avnet, Depth=0.8mm, Lead Free="Lead Free", Length=1.6mm, Manufacturer Part Number 1=VJ0603Y224KXJCW1BC, Mount="Surface Mount", Packaging="Tape and Reel", Pricing 1="1=0.10000, 10=0.07000, 100=0.03100, 500=0.02214, 1000=0.01739 (USD)", RoHS=Yes, Stock 1=890490, Supplier 1=Digi-Key
C6 C8 C11 C13 C15 C18 C22 C26 C31: library part GCM21BR71A106KE22K, "CAP CER 10UF 10V X7R 0805", Case/Package=0805, Case Code (Metric)=2012, Dielectric=X7R, Manufacturer 1=Murata, Max Operating Temperature=125°C, Min Operating Temperature=-55°C, Package Quantity=10000, Ratings=AEC-Q200, Supplier Part Number 1=490-14531-1-ND, Tolerance=10%, Voltage Rating=10V, Capacitance=10uF, Case Code (Imperial)=0805, ComponentLink1Description=http://www.mouser.com/ds/2/281/c03e-806517.pdf?src-supplier=Mouser, ComponentLink1URL=http://www.mouser.com/ds/2/281/c03e-806517.pdf?src-supplier=Mouser, ComponentLink2Description=http://search.murata.co.jp/Ceramy/image/img/A01X/G101/ENG/GCM21BR71A106KE22-01.pdf?src-supplier=Digi-Key, ComponentLink2URL=http://search.murata.co.jp/Ceramy/image/img/A01X/G101/ENG/GCM21BR71A106KE22-01.pdf?src-supplier=Digi-Key, ComponentLink3Description=http://search.murata.co.jp/Ceramy/image/img/A01X/partnumbering_e_02.pdf?src-supplier=Digi-Key, ComponentLink3URL=http://search.murata.co.jp/Ceramy/image/img/A01X/partnumbering_e_02.pdf?src-supplier=Digi-Key, Height=1.25mm, Length=0.079inch, Manufacturer Part Number 1=GCM21BR71A106KE22K, Mount="Surface Mount", Packaging="Tape and Reel", Pricing 1="1=0.57000, 10=0.40300, 100=0.26540, 500=0.19658, 1000=0.16709, 2500=0.15726, 5000=0.14744 (USD)", RoHS=Yes, Stock 1=78878, Supplier 1=Digi-Key, Termination=SMD/SMT, Thickness=0.055inch, Voltage Rating (DC)=10V, Weight=0.000335oz, Width=1.25mm
C10 C17: library part VJ0805Y474JXJTW1BC, "Multilayer Ceramic Capacitors MLCC - SMD/SMT 0805 0.47uF 16volts X7R 5%", Capacitance=470nF, Case/Package=0805, Case Code (Metric)=2012, Dielectric=X7R, Dielectric Material=Tantalum, Manufacturer 1="Vishay Vitramon", Max Operating Temperature=125°C, Min Operating Temperature=-55°C, Package Quantity=3000, Supplier Part Number 1=720-1774-1-ND, Tolerance=5%, Voltage Rating (DC)=16V, Case Code (Imperial)=0805, ComponentLink1Description=https://datasheet.ciiva.com/11490/vjw1bcbascomseries-11490678.pdf?src-supplier=Avnet, ComponentLink1URL=https://datasheet.ciiva.com/11490/vjw1bcbascomseries-11490678.pdf?src-supplier=Avnet, ComponentLink2Description=https://datasheet.ciiva.com/5427/vjw1bcbascomseries-223529-5427159.pdf?src-supplier=Mouser, ComponentLink2URL=https://datasheet.ciiva.com/5427/vjw1bcbascomseries-223529-5427159.pdf?src-supplier=Mouser, Depth=1.25mm, Height=1.45mm, Lead Free="Lead Free", Length=2mm, Manufacturer Part Number 1=VJ0805Y474JXJTW1BC, Mount="Surface Mount", Packaging="Tape and Reel", Pricing 1="1=0.39000, 10=0.27000, 100=0.16180, 500=0.12132, 1000=0.10245 (USD)", RoHS=Yes, Stock 1=1897, Supplier 1=Digi-Key, Termination=SMD/SMT, Width=1.25mm
C21: library part 04025C562JAT2A, "Multilayer Ceramic Capacitors MLCC - SMD/SMT 50volts 5600pF 5% C0G", Case/Package=0603, Case Code (Metric)=1608, Dielectric=C0G, Dielectric Material=Ceramic, Max Operating Temperature=125°C, Min Operating Temperature=-55°C, Package Quantity=4000, Supplier Part Number 1=478-10129-1-ND, Temperature Coefficient=30ppm/°C, Tolerance=5%, Voltage=50V, Capacitance=5.6nF, Case Code (Imperial)=0603, ComponentLink1Description=https://datasheet.ciiva.com/28608/1372242-28608633.pdf?src-supplier=Element14, ComponentLink1URL=https://datasheet.ciiva.com/28608/1372242-28608633.pdf?src-supplier=Element14, ComponentLink2Description=https://datasheet.ciiva.com/22705/40889-22705450.pdf?src-supplier=Element14, ComponentLink2URL=https://datasheet.ciiva.com/22705/40889-22705450.pdf?src-supplier=Element14, ComponentLink3Description=https://datasheet.ciiva.com/26847/getdatasheetpartid-385577-26847722.pdf?src-supplier=Verical, ComponentLink3URL=https://datasheet.ciiva.com/26847/getdatasheetpartid-385577-26847722.pdf?src-supplier=Verical, ComponentLink4Description=https://datasheet.ciiva.com/7823/40889-7823822.pdf?src-supplier=Element14, ComponentLink4URL=https://datasheet.ciiva.com/7823/40889-7823822.pdf?src-supplier=Element14, ComponentLink5Description=https://datasheet.ciiva.com/5448/kem-c1003-c0g-smd-356956-5448159.pdf?src-supplier=Mouser, ComponentLink5URL=https://datasheet.ciiva.com/5448/kem-c1003-c0g-smd-356956-5448159.pdf?src-supplier=Mouser, Depth=0.8mm, Dissipation Factor=0.1%, Height=0.8mm, Lead Free="Lead Free", Length=1.6mm, Mount="Surface Mount", Number of Pins=2, Packaging="Tape and Reel", Radiation Hardening=No, REACH SVHC="No SVHC", RoHS=Yes, Supplier 1=Digi-Key, Termination=SMD/SMT, Thickness=0.034inch, Voltage Rating=50V, Voltage Rating (DC)=50V, Width=0.031inch
C23: library part GRM155R71A104JA01D, "0402 0.1 uF 10 V ±5% Tolerance X7R SMT Multilayer Ceramic Capacitor", Capacitance=100nF, Case/Package=0402, Case Code (Metric)=1005, Dielectric=X7R, Manufacturer 1=Murata, Max Operating Temperature=125°C, Min Operating Temperature=-55°C, Package Quantity=10000, Supplier Part Number 1=490-10777-1-ND, Tolerance=5%, Voltage Rating=10V, Case Code (Imperial)=0402, ComponentLink1Description=https://datasheet.ciiva.com/5411/product-5411135.pdf?src-supplier=Mouser, ComponentLink1URL=https://datasheet.ciiva.com/5411/product-5411135.pdf?src-supplier=Mouser, ComponentLink2Description=https://datasheet.ciiva.com/11618/c02e-11618821.pdf?src-supplier=Avnet, ComponentLink2URL=https://datasheet.ciiva.com/11618/c02e-11618821.pdf?src-supplier=Avnet, Depth=0.5mm, Height=0.5mm, Lead Free="Lead Free", Length=1mm, Manufacturer Part Number 1=GRM155R71A104JA01D, Mount="Surface Mount", Packaging="Tape and Reel", Pricing 1="1=0.10000, 10=0.02800, 100=0.01240, 500=0.00886, 1000=0.00696, 2500=0.00632, 5000=0.00582 (USD)", Radiation Hardening=No, RoHS=Yes, Stock 1=1113659, Supplier 1=Digi-Key, Termination=SMD/SMT, Thickness=0.022inch, Voltage Rating (DC)=10V, Width=0.02inch
C24: library part 04025C391JAT2A, "CAP CER 390PF 50V C0G/NP0 0603", Case/Package=0603, Case Code (Metric)=1608, Dielectric=C0G, Dielectric Material=Ceramic, Max Operating Temperature=125°C, Min Operating Temperature=-55°C, Package Quantity=1, Supplier Part Number 1=478-5269-1-ND, Temperature Coefficient=30ppm/°C, Tolerance=5%, Voltage=50V, Capacitance=390pF, Case Code (Imperial)=0603, ComponentLink1Description=https://datasheet.ciiva.com/144/docfinderpartnumber-c0603c391j5gactu-144833.pdf?src-supplier=Digi-Key, ComponentLink1URL=https://datasheet.ciiva.com/144/docfinderpartnumber-c0603c391j5gactu-144833.pdf?src-supplier=Digi-Key, ComponentLink2Description=https://datasheet.ciiva.com/7823/40889-7823769.pdf?src-supplier=Element14, ComponentLink2URL=https://datasheet.ciiva.com/7823/40889-7823769.pdf?src-supplier=Element14, ComponentLink3Description=https://datasheet.ciiva.com/7823/40889-7823770.pdf?src-supplier=Element14, ComponentLink3URL=https://datasheet.ciiva.com/7823/40889-7823770.pdf?src-supplier=Element14, ComponentLink4Description=https://datasheet.ciiva.com/5415/kem-c1003-c0g-smd-356956-5415640.pdf?src-supplier=Mouser, ComponentLink4URL=https://datasheet.ciiva.com/5415/kem-c1003-c0g-smd-356956-5415640.pdf?src-supplier=Mouser, ComponentLink5Description=https://datasheet.ciiva.com/18102/getdatasheetpartid-77374-18102795.pdf?src-supplier=Verical, ComponentLink5URL=https://datasheet.ciiva.com/18102/getdatasheetpartid-77374-18102795.pdf?src-supplier=Verical, ComponentLink6Description=https://datasheet.ciiva.com/18219/getdatasheetpartid-385544-18219227.pdf?src-supplier=Verical, ComponentLink6URL=https://datasheet.ciiva.com/18219/getdatasheetpartid-385544-18219227.pdf?src-supplier=Verical, Depth=0.8mm, Dissipation Factor=0.1%, Height=0.8mm, Lead Free="Lead Free", Lead Pitch=0.7mm, Length=1.6mm, Mount="Surface Mount,PCB", Number of Pins=2, Packaging="Tape and Reel", Radiation Hardening=No, REACH SVHC="No SVHC", RoHS=Yes, Supplier 1=Digi-Key, Termination=SMD/SMT, Thickness=0.034inch, Voltage Rating=50V, Voltage Rating (DC)=50V, Width=0.8mm
C27: library part ESK106M035AC3AA, "CAP ALUM 10UF 20% 35V RADIAL", Case/Package=Radial, Dielectric Material=Aluminium, Leakage Current=3uA, Max Operating Temperature=85°C, Min Operating Temperature=-40°C, Package Quantity=1, Ripple Current=23mA, Tolerance=20%, Voltage=16V, Capacitance=10uF, ComponentLink1Description=digikey, ComponentLink1URL=https://www.digikey.com/product-detail/en/kemet/ESK106M035AC3AA/399-6598-ND/3083013, Diameter=4mm, Dissipation Factor=0.16%, Height=5.4mm, Height - Seated (Max)=0.213inch, Lead Free="Lead Free", Length=5.4mm, Life (Hours)=2000Hour, Mount="Surface Mount,PCB", Number of Pins=2, Packaging="Tape and Reel", Radiation Hardening=No, REACH SVHC="No SVHC", Ripple Current (AC)=23mA, RoHS=Yes, Termination=SMD/SMT, Voltage Rating=16V, Voltage Rating (DC)=16V, Weight=0.01lb, Width=4.3mm
C28: library part 293D106X9016B2TE3, "CAP TANT 10UF 10% 16V 1411", Capacitance=10uF, Case/Package=1411, Case Code (Metric)=3528, Dielectric Material=Tantalum, ESR (Equivalent Series Resistance)=2R, Leakage Current=1.6uA, Manufacturer 1="Vishay Sprague", Max Operating Temperature=125°C, Min Operating Temperature=-55°C, Package Quantity=1, Ripple Current=160mA, Supplier Part Number 1=718-1124-1-ND, Tolerance=10%, Voltage=16V, Case Code (Imperial)=1411, ComponentLink1Description=https://datasheet.ciiva.com/11793/0900766b80d97b37-11793046.pdf?src-supplier=RSComponents, ComponentLink1URL=https://datasheet.ciiva.com/11793/0900766b80d97b37-11793046.pdf?src-supplier=RSComponents, ComponentLink2Description=https://datasheet.ciiva.com/27054/1931190-27054953.pdf?src-supplier=Jameco, ComponentLink2URL=https://datasheet.ciiva.com/27054/1931190-27054953.pdf?src-supplier=Jameco, ComponentLink3Description=https://datasheet.ciiva.com/258/293d-258176.pdf?src-supplier=Digi-Key, ComponentLink3URL=https://datasheet.ciiva.com/258/293d-258176.pdf?src-supplier=Digi-Key, ComponentLink4Description=https://datasheet.ciiva.com/258/293d-258177.pdf?src-supplier=Digi-Key, ComponentLink4URL=https://datasheet.ciiva.com/258/293d-258177.pdf?src-supplier=Digi-Key, ComponentLink5Description=https://datasheet.ciiva.com/16632/293d-16632453.pdf?src-supplier=Avnet+Europe, ComponentLink5URL=https://datasheet.ciiva.com/16632/293d-16632453.pdf?src-supplier=Avnet+Europe, ComponentLink6Description=https://datasheet.ciiva.com/3003/293d-3003830.pdf?src-supplier=Avnet, ComponentLink6URL=https://datasheet.ciiva.com/3003/293d-3003830.pdf?src-supplier=Avnet, ComponentLink7Description=https://datasheet.ciiva.com/16308/293d-16308278.pdf?src-supplier=Future+Electronics, ComponentLink7URL=https://datasheet.ciiva.com/16308/293d-16308278.pdf?src-supplier=Future+Electronics, ComponentLink8Description=https://datasheet.ciiva.com/3003/293d-3003831.pdf?src-supplier=Avnet, ComponentLink8URL=https://datasheet.ciiva.com/3003/293d-3003831.pdf?src-supplier=Avnet, ComponentLink9Description=https://datasheet.ciiva.com/12882/293d-239871-12882647.pdf?src-supplier=Mouser, ComponentLink9URL=https://datasheet.ciiva.com/12882/293d-239871-12882647.pdf?src-supplier=Mouser, ComponentLink10Description=https://datasheet.ciiva.com/18444/70212567-18444888.pdf?src-supplier=Allied+Electronics, ComponentLink10URL=https://datasheet.ciiva.com/18444/70212567-18444888.pdf?src-supplier=Allied+Electronics, ComponentLink11Description=https://datasheet.ciiva.com/22695/438417-22695112.pdf?src-supplier=Element14, ComponentLink11URL=https://datasheet.ciiva.com/22695/438417-22695112.pdf?src-supplier=Element14, ComponentLink12Description=https://datasheet.ciiva.com/22644/1748031-22644446.pdf?src-supplier=Element14, ComponentLink12URL=https://datasheet.ciiva.com/22644/1748031-22644446.pdf?src-supplier=Element14, ComponentLink13Description=https://datasheet.ciiva.com/258/293d-258175.pdf?src-supplier=Digi-Key, ComponentLink13URL=https://datasheet.ciiva.com/258/293d-258175.pdf?src-supplier=Digi-Key, ComponentLink14Description=https://datasheet.ciiva.com/29243/454876-da-01-en-smd-kondensator-293d106x9016b2te3-2000st-29243877.pdf?src-supplier=Conrad, ComponentLink14URL=https://datasheet.ciiva.com/29243/454876-da-01-en-smd-kondensator-293d106x9016b2te3-2000st-29243877.pdf?src-supplier=Conrad, Depth=2.8mm, Dissipation Factor=6%, Features="General Purpose", Height=1.9mm, Height - Seated (Max)=0.083inch, Lead Free="Lead Free", Length=3.5mm, Manufacturer Part Number 1=293D106X9016B2TE3, Mount="Surface Mount,PCB", Packaging="Tape and Reel", Polarity=Polar, Pricing 1="1=0.44000, 10=0.30500, 100=0.18290, 500=0.13714, 1000=0.11581 (USD)", Q Factor=6, Radiation Hardening=No, REACH SVHC=Unknown, RoHS=Yes, Stock 1=399568, Supplier 1=Digi-Key, Termination=SMD/SMT, Voltage Rating=16V, Voltage Rating (DC)=16V, Width=0.11inch
C35 C36: library part 06035A190FAT2A, "Multilayer Ceramic Capacitors MLCC - SMD/SMT 50V 18pF C0G 0603 1% Tol", Capacitance=36pF, Case/Package=0603, Case Code (Metric)=1608, Dielectric=C0G, Max Operating Temperature=125°C, Min Operating Temperature=-55°C, Package Quantity=8000, Supplier Part Number 1=478-10293-1-ND, Tolerance=1%, Voltage Rating=50V, Case Code (Imperial)=0603, ComponentLink1Description=https://datasheet.ciiva.com/11567/ccog-11567927.pdf?src-supplier=Avnet, ComponentLink1URL=https://datasheet.ciiva.com/11567/ccog-11567927.pdf?src-supplier=Avnet, ComponentLink2Description=https://datasheet.ciiva.com/5423/ccog-243403-5423289.pdf?src-supplier=Mouser, ComponentLink2URL=https://datasheet.ciiva.com/5423/ccog-243403-5423289.pdf?src-supplier=Mouser, ComponentLink3Description=https://datasheet.ciiva.com/17492/ccog-17492554.pdf?src-supplier=Avnet+Europe, ComponentLink3URL=https://datasheet.ciiva.com/17492/ccog-17492554.pdf?src-supplier=Avnet+Europe, ComponentLink4Description=https://datasheet.ciiva.com/209/ccog-209692.pdf?src-supplier=Digi-Key, ComponentLink4URL=https://datasheet.ciiva.com/209/ccog-209692.pdf?src-supplier=Digi-Key, Depth=0.81mm, Length=1.6mm, Mount="Surface Mount", Packaging="Tape and Reel", Radiation Hardening=No, RoHS=Yes, Supplier 1=Digi-Key, Termination=SMD/SMT, Thickness=0.035inch, Voltage Rating (DC)=50V, Width=0.81mm
D1 D4: library part LTST-C191KGKT, "LED Uni-Color Green 574nm 2-Pin Chip LED T/R", Case/Package=0603, Case Code (Metric)=1608, Color=Green, Forward Current=30mA, Forward Voltage=2V, Lens Color=Colorless, Manufacturer 1="Vishay Lite-On", Max Operating Temperature=85°C, Min Operating Temperature=-55°C, Package Quantity=1, Power Dissipation=75mW, Reverse Voltage=5V, Supplier Part Number 1=160-1446-1-ND, Test Current=20mA, Case Code (Imperial)=0603, ComponentLink1Description=https://datasheet.ciiva.com/12400/100-ltst-c191kgkt-53586-12400818.pdf?src-supplier=Mouser, ComponentLink1URL=https://datasheet.ciiva.com/12400/100-ltst-c191kgkt-53586-12400818.pdf?src-supplier=Mouser, ComponentLink2Description=https://datasheet.ciiva.com/11773/0900766b80dc02b1-11773629.pdf?src-supplier=RSComponents, ComponentLink2URL=https://datasheet.ciiva.com/11773/0900766b80dc02b1-11773629.pdf?src-supplier=RSComponents, ComponentLink3Description=https://datasheet.ciiva.com/16215/ltst-c191kgkt-16215151.pdf?src-supplier=Future+Electronics, ComponentLink3URL=https://datasheet.ciiva.com/16215/ltst-c191kgkt-16215151.pdf?src-supplier=Future+Electronics, ComponentLink4Description=https://datasheet.ciiva.com/2109/s-110-ltst-c191kgkt-2109973.pdf?src-supplier=Digi-Key, ComponentLink4URL=https://datasheet.ciiva.com/2109/s-110-ltst-c191kgkt-2109973.pdf?src-supplier=Digi-Key, ComponentLink5Description=https://datasheet.ciiva.com/2109/s-110-ltst-c191kgkt-2109974.pdf?src-supplier=Digi-Key, ComponentLink5URL=https://datasheet.ciiva.com/2109/s-110-ltst-c191kgkt-2109974.pdf?src-supplier=Digi-Key, ComponentLink6Description=https://datasheet.ciiva.com/2109/s-110-ltst-c191kgkt-2109975.pdf?src-supplier=Digi-Key, ComponentLink6URL=https://datasheet.ciiva.com/2109/s-110-ltst-c191kgkt-2109975.pdf?src-supplier=Digi-Key, ComponentLink7Description=https://datasheet.ciiva.com/15223/getdatasheetpartid-103913-15223276.pdf?src-supplier=Verical, ComponentLink7URL=https://datasheet.ciiva.com/15223/getdatasheetpartid-103913-15223276.pdf?src-supplier=Verical, Depth=0.8mm, Dominant Wavelength=571nm, Height=0.55mm, Illumination Color=Green, Lead Free="Lead Free", Length=1.6mm, Lens Style=Diffused,Colorless,Rectangular,Clear, Lens Transparency=Clear, Luminous Intensity=35mcd, Manufacturer Part Number 1=LTST-C191KGKT, Mount="Surface Mount", Number of Elements=1, Number of LEDs=1, Number of Pins=2, Packaging="Tape and Reel", Power Rating=75mW, Pricing 1="1=0.28000, 10=0.20100, 100=0.09540, 500=0.06364, 1000=0.04984, 2500=0.04878 (USD)", Radiation Hardening=No, RoHS=Yes, Stock 1=1002642, Supplier 1=Digi-Key, Viewing Angle=130°, Wavelength=574nm, Width=0.8mm
D2: library part LTST-C191KRKT, "LED; SMD; 0603; red; 18-54mcd; 1.6x0.8x0.55mm; 130°; 2÷2.4V; 20mA", Case/Package=0603, Case Code (Metric)=1608, Color=Red, Forward Current=30mA, Forward Voltage=2V, Lens Color=Colorless, Manufacturer 1="Vishay Lite-On", Max Operating Temperature=85°C, Min Operating Temperature=-55°C, Package Quantity=1, Power Dissipation=75mW, Reverse Voltage=5V, Supplier Part Number 1=160-1447-1-ND, Test Current=20mA, Case Code (Imperial)=0603, ComponentLink1Description=https://datasheet.ciiva.com/11773/0900766b80dc02b2-11773601.pdf?src-supplier=RSComponents, ComponentLink1URL=https://datasheet.ciiva.com/11773/0900766b80dc02b2-11773601.pdf?src-supplier=RSComponents, ComponentLink2Description=https://datasheet.ciiva.com/16212/ltst-c191krkt-16212419.pdf?src-supplier=Future+Electronics, ComponentLink2URL=https://datasheet.ciiva.com/16212/ltst-c191krkt-16212419.pdf?src-supplier=Future+Electronics, ComponentLink3Description=https://datasheet.ciiva.com/15117/getdatasheetpartid-141922-15117737.pdf?src-supplier=Verical, ComponentLink3URL=https://datasheet.ciiva.com/15117/getdatasheetpartid-141922-15117737.pdf?src-supplier=Verical, ComponentLink4Description=https://datasheet.ciiva.com/12400/lite-on-ltst-c191krkt-190135-12400910.pdf?src-supplier=Mouser, ComponentLink4URL=https://datasheet.ciiva.com/12400/lite-on-ltst-c191krkt-190135-12400910.pdf?src-supplier=Mouser, ComponentLink5Description=https://datasheet.ciiva.com/2109/s-110-ltst-c191krkt-2109970.pdf?src-supplier=Digi-Key, ComponentLink5URL=https://datasheet.ciiva.com/2109/s-110-ltst-c191krkt-2109970.pdf?src-supplier=Digi-Key, ComponentLink6Description=https://datasheet.ciiva.com/2109/s-110-ltst-c191krkt-2109971.pdf?src-supplier=Digi-Key, ComponentLink6URL=https://datasheet.ciiva.com/2109/s-110-ltst-c191krkt-2109971.pdf?src-supplier=Digi-Key, ComponentLink7Description=https://datasheet.ciiva.com/2109/s-110-ltst-c191krkt-2109972.pdf?src-supplier=Digi-Key, ComponentLink7URL=https://datasheet.ciiva.com/2109/s-110-ltst-c191krkt-2109972.pdf?src-supplier=Digi-Key, Depth=0.8mm, Dominant Wavelength=631nm, Height=0.55mm, Illumination Color=Red, Lead Free="Lead Free", Length=1.6mm, Lens Style=Clear,Diffused,Colorless,Rectangular, Lens Transparency=Clear, Luminous Intensity=54mcd, Manufacturer Part Number 1=LTST-C191KRKT, Mount="Surface Mount", Number of Elements=1, Number of LEDs=1, Number of Pins=2, Packaging="Tape and Reel", Power Rating=75mW, Pricing 1="1=0.28000, 10=0.20100, 100=0.09540, 500=0.06364, 1000=0.04984, 2500=0.04878 (USD)", Radiation Hardening=No, RoHS=Yes, Stock 1=499953, Supplier 1=Digi-Key, Viewing Angle=130°, Voltage=2V, Wavelength=639nm, Width=0.8mm
D3: library part LTST-C19HE1WT, "Lite-On LTST-C19HE1WT, LTST Series 3 RGB LED, 470 / 525 / 624 nm 3-Pin, Rectangle Lens SMD package", Case/Package=0606, Case Code (Metric)=1616, Color=Blue,Green,Red, Forward Current=20mA, Forward Voltage=3.35V, Lens Color=White, Manufacturer 1="Vishay Lite-On", Max Operating Temperature=80°C, Min Operating Temperature=-20°C, Package Quantity=3000, Reverse Voltage=5V, Supplier Part Number 1=160-2162-1-ND, Case Code (Imperial)=0606, ComponentLink1Description=https://datasheet.ciiva.com/11773/0900766b80dc0566-11773828.pdf?src-supplier=RSComponents, ComponentLink1URL=https://datasheet.ciiva.com/11773/0900766b80dc0566-11773828.pdf?src-supplier=RSComponents, ComponentLink2Description=https://datasheet.ciiva.com/41805/s-110-ltst-c19he1wt-41805918.pdf?src-supplier=Digi-Key, ComponentLink2URL=https://datasheet.ciiva.com/41805/s-110-ltst-c19he1wt-41805918.pdf?src-supplier=Digi-Key, Depth=1.6mm, Dominant Wavelength=470nm, Height=0.35mm, Lead Free="Lead Free", Length=1.6mm, Lens Style=Diffused,Colorless,Rectangular, Lens Transparency=Diffused, Luminous Intensity=180mcd, Manufacturer Part Number 1=LTST-C19HE1WT, Mount="Surface Mount", Number of Elements=3, Number of LEDs=3, Number of Pins=4, Packaging="Tape and Reel", Pricing 1="1=0.56000, 10=0.40500, 100=0.26440, 500=0.19008, 1000=0.14875 (USD)", Radiation Hardening=No, RoHS=Yes, Stock 1=98926, Supplier 1=Digi-Key, Test Current=20mA, Viewing Angle=130°, Width=1.6mm
F1: library part C1T750, "FUSE 750MA 63VAC/DC SLOW 1206", Case/Package=1206, Case Code (Metric)=3216, Current Rating=750mA, Manufacturer 1="Bel TRP", Max Operating Temperature=125°C, Min Operating Temperature=-55°C, Supplier Part Number 1=507-1890-1-ND, Voltage Rating=63V, Approvals=CE,cURus, Case Code (Imperial)=1206, ComponentLink1Description=http://www.mouser.com/ds/2/643/C1T-594765.pdf?src-supplier=Mouser, ComponentLink1URL=http://www.mouser.com/ds/2/643/C1T-594765.pdf?src-supplier=Mouser, ComponentLink2Description=http://belfuse.com/pdfs/C1T.pdf?src-supplier=Avnet, ComponentLink2URL=http://belfuse.com/pdfs/C1T.pdf?src-supplier=Avnet, ComponentLink3Description=https://belfuse.com/resources/datasheets/circuitprotection/ds-cp-c1t-series.pdf?src-supplier=Digi-Key, ComponentLink3URL=https://belfuse.com/resources/datasheets/circuitprotection/ds-cp-c1t-series.pdf?src-supplier=Digi-Key, Contact Plating=Tin, Fuse Type="Board Mount (Cartridge Style Excluded)", Length=0.126inch, Manufacturer Part Number 1=C1T750, Mount="Surface Mount", Number of Pins=2, Packaging="Tape and Reel", Pricing 1="1=0.31000, 5=0.29800, 10=0.28500, 50=0.25460, 100=0.23700, 250=0.21068, 500=0.17556, 1000=0.16678 (USD)", RoHS=Yes, Stock 1=49664, Supplier 1=Digi-Key, Voltage Rating (AC)=63V, Voltage Rating (DC)=63V, Width=0.062inch
J1_PreAmp1 J1_PreAmp2 J1_PreAmp3 J1_PreAmp4: library part hydrophone_connector
J2: library part J4
J4: library part RASPI_4
R1_PreAmp1 R1_PreAmp2 R1_PreAmp3 R1_PreAmp4 R4_PreAmp1 R4_PreAmp2 R4_PreAmp3 R4_PreAmp4: library part MCT06030C1004FP500, "RES SMD 1M OHM 1% 1/8W 0603", Case/Package=0603, Case Code (Metric)=1608, Manufacturer 1="Vishay Beyschlag", Max Operating Temperature=125°C, Max Power Dissipation=125mW, Min Operating Temperature=-55°C, Package Quantity=1, Power Rating=100mW, Resistance=1MR, Supplier Part Number 1=MCT0603-1.00M-CFCT-ND, Temperature Coefficient=50ppm/°C, Tolerance=1%, Voltage Rating=75V, Case Code (Imperial)=0603, ComponentLink1Description=https://datasheet.ciiva.com/2470/mc-pro-2470384.pdf?src-supplier=Digi-Key, ComponentLink1URL=https://datasheet.ciiva.com/2470/mc-pro-2470384.pdf?src-supplier=Digi-Key, ComponentLink2Description=https://datasheet.ciiva.com/2470/mc-pro-2470385.pdf?src-supplier=Digi-Key, ComponentLink2URL=https://datasheet.ciiva.com/2470/mc-pro-2470385.pdf?src-supplier=Digi-Key, ComponentLink3Description=https://datasheet.ciiva.com/2470/mc-pro-2470386.pdf?src-supplier=Digi-Key, ComponentLink3URL=https://datasheet.ciiva.com/2470/mc-pro-2470386.pdf?src-supplier=Digi-Key, ComponentLink4Description=https://datasheet.ciiva.com/9112/mc-pro-9112535.pdf?src-supplier=Avnet, ComponentLink4URL=https://datasheet.ciiva.com/9112/mc-pro-9112535.pdf?src-supplier=Avnet, ComponentLink5Description=https://datasheet.ciiva.com/16893/mc-pro-16893006.pdf?src-supplier=Avnet+Europe, ComponentLink5URL=https://datasheet.ciiva.com/16893/mc-pro-16893006.pdf?src-supplier=Avnet+Europe, Composition="Thin Film", Contact Plating=Tin, Depth=0.85mm, Height=0.022inch, Lead Free="Lead Free", Length=0.061inch, Manufacturer Part Number 1=MCT06030C1004FP500, Military Standard=Not, Mount="Surface Mount", Number of Terminations=2, Packaging="Tape and Reel", Pricing 1="1=0.18000, 10=0.15200, 100=0.05960, 1000=0.02495, 2500=0.02287 (USD)", Radiation Hardening=No, REACH SVHC=Unknown, RoHS=Yes, Stock 1=189743, Supplier 1=Digi-Key, Termination=SMD/SMT, Voltage Rating (DC)=75V, Weight=7.1E-05oz, Width=0.033inch
R2_PreAmp1 R2_PreAmp2 R2_PreAmp3 R2_PreAmp4 R3_PreAmp1 R3_PreAmp2 R3_PreAmp3 R3_PreAmp4: library part MCT06030C3300FP500, "RES SMD 330 OHM 1% 1/8W 0603", Case/Package=0603, Case Code (Metric)=1608, Manufacturer 1="Vishay Beyschlag", Max Operating Temperature=125°C, Max Power Dissipation=125mW, Min Operating Temperature=-55°C, Package Quantity=1, Resistance=330R, Supplier Part Number 1=MCT0603-330-CFCT-ND, Temperature Coefficient=50ppm/°C, Tolerance=1%, Voltage Rating=75V, Case Code (Imperial)=0603, ComponentLink1Description=https://datasheet.ciiva.com/2470/mc-pro-2470441.pdf?src-supplier=Digi-Key, ComponentLink1URL=https://datasheet.ciiva.com/2470/mc-pro-2470441.pdf?src-supplier=Digi-Key, ComponentLink2Description=https://datasheet.ciiva.com/2470/mc-pro-2470442.pdf?src-supplier=Digi-Key, ComponentLink2URL=https://datasheet.ciiva.com/2470/mc-pro-2470442.pdf?src-supplier=Digi-Key, ComponentLink3Description=https://datasheet.ciiva.com/2470/mc-pro-2470443.pdf?src-supplier=Digi-Key, ComponentLink3URL=https://datasheet.ciiva.com/2470/mc-pro-2470443.pdf?src-supplier=Digi-Key, ComponentLink4Description=https://datasheet.ciiva.com/16892/mc-pro-16892683.pdf?src-supplier=Avnet+Europe, ComponentLink4URL=https://datasheet.ciiva.com/16892/mc-pro-16892683.pdf?src-supplier=Avnet+Europe, ComponentLink5Description=https://datasheet.ciiva.com/8898/mc-pro-8898943.pdf?src-supplier=Avnet, ComponentLink5URL=https://datasheet.ciiva.com/8898/mc-pro-8898943.pdf?src-supplier=Avnet, Composition="Thin Film", Contact Plating=Tin, Depth=0.85mm, Height=0.022inch, Lead Free="Lead Free", Length=0.061inch, Manufacturer Part Number 1=MCT06030C3300FP500, Military Standard=Not, Number of Terminations=2, Packaging="Tape and Reel", Power Rating=125mW, Pricing 1="1=0.18000, 10=0.15200, 100=0.05960, 1000=0.02495, 2500=0.02287 (USD)", Radiation Hardening=No, REACH SVHC="No SVHC", RoHS=Yes, Stock 1=133742, Supplier 1=Digi-Key, Voltage Rating (DC)=75V, Width=0.033inch